# Allegro board Rk3399_fanout.brd
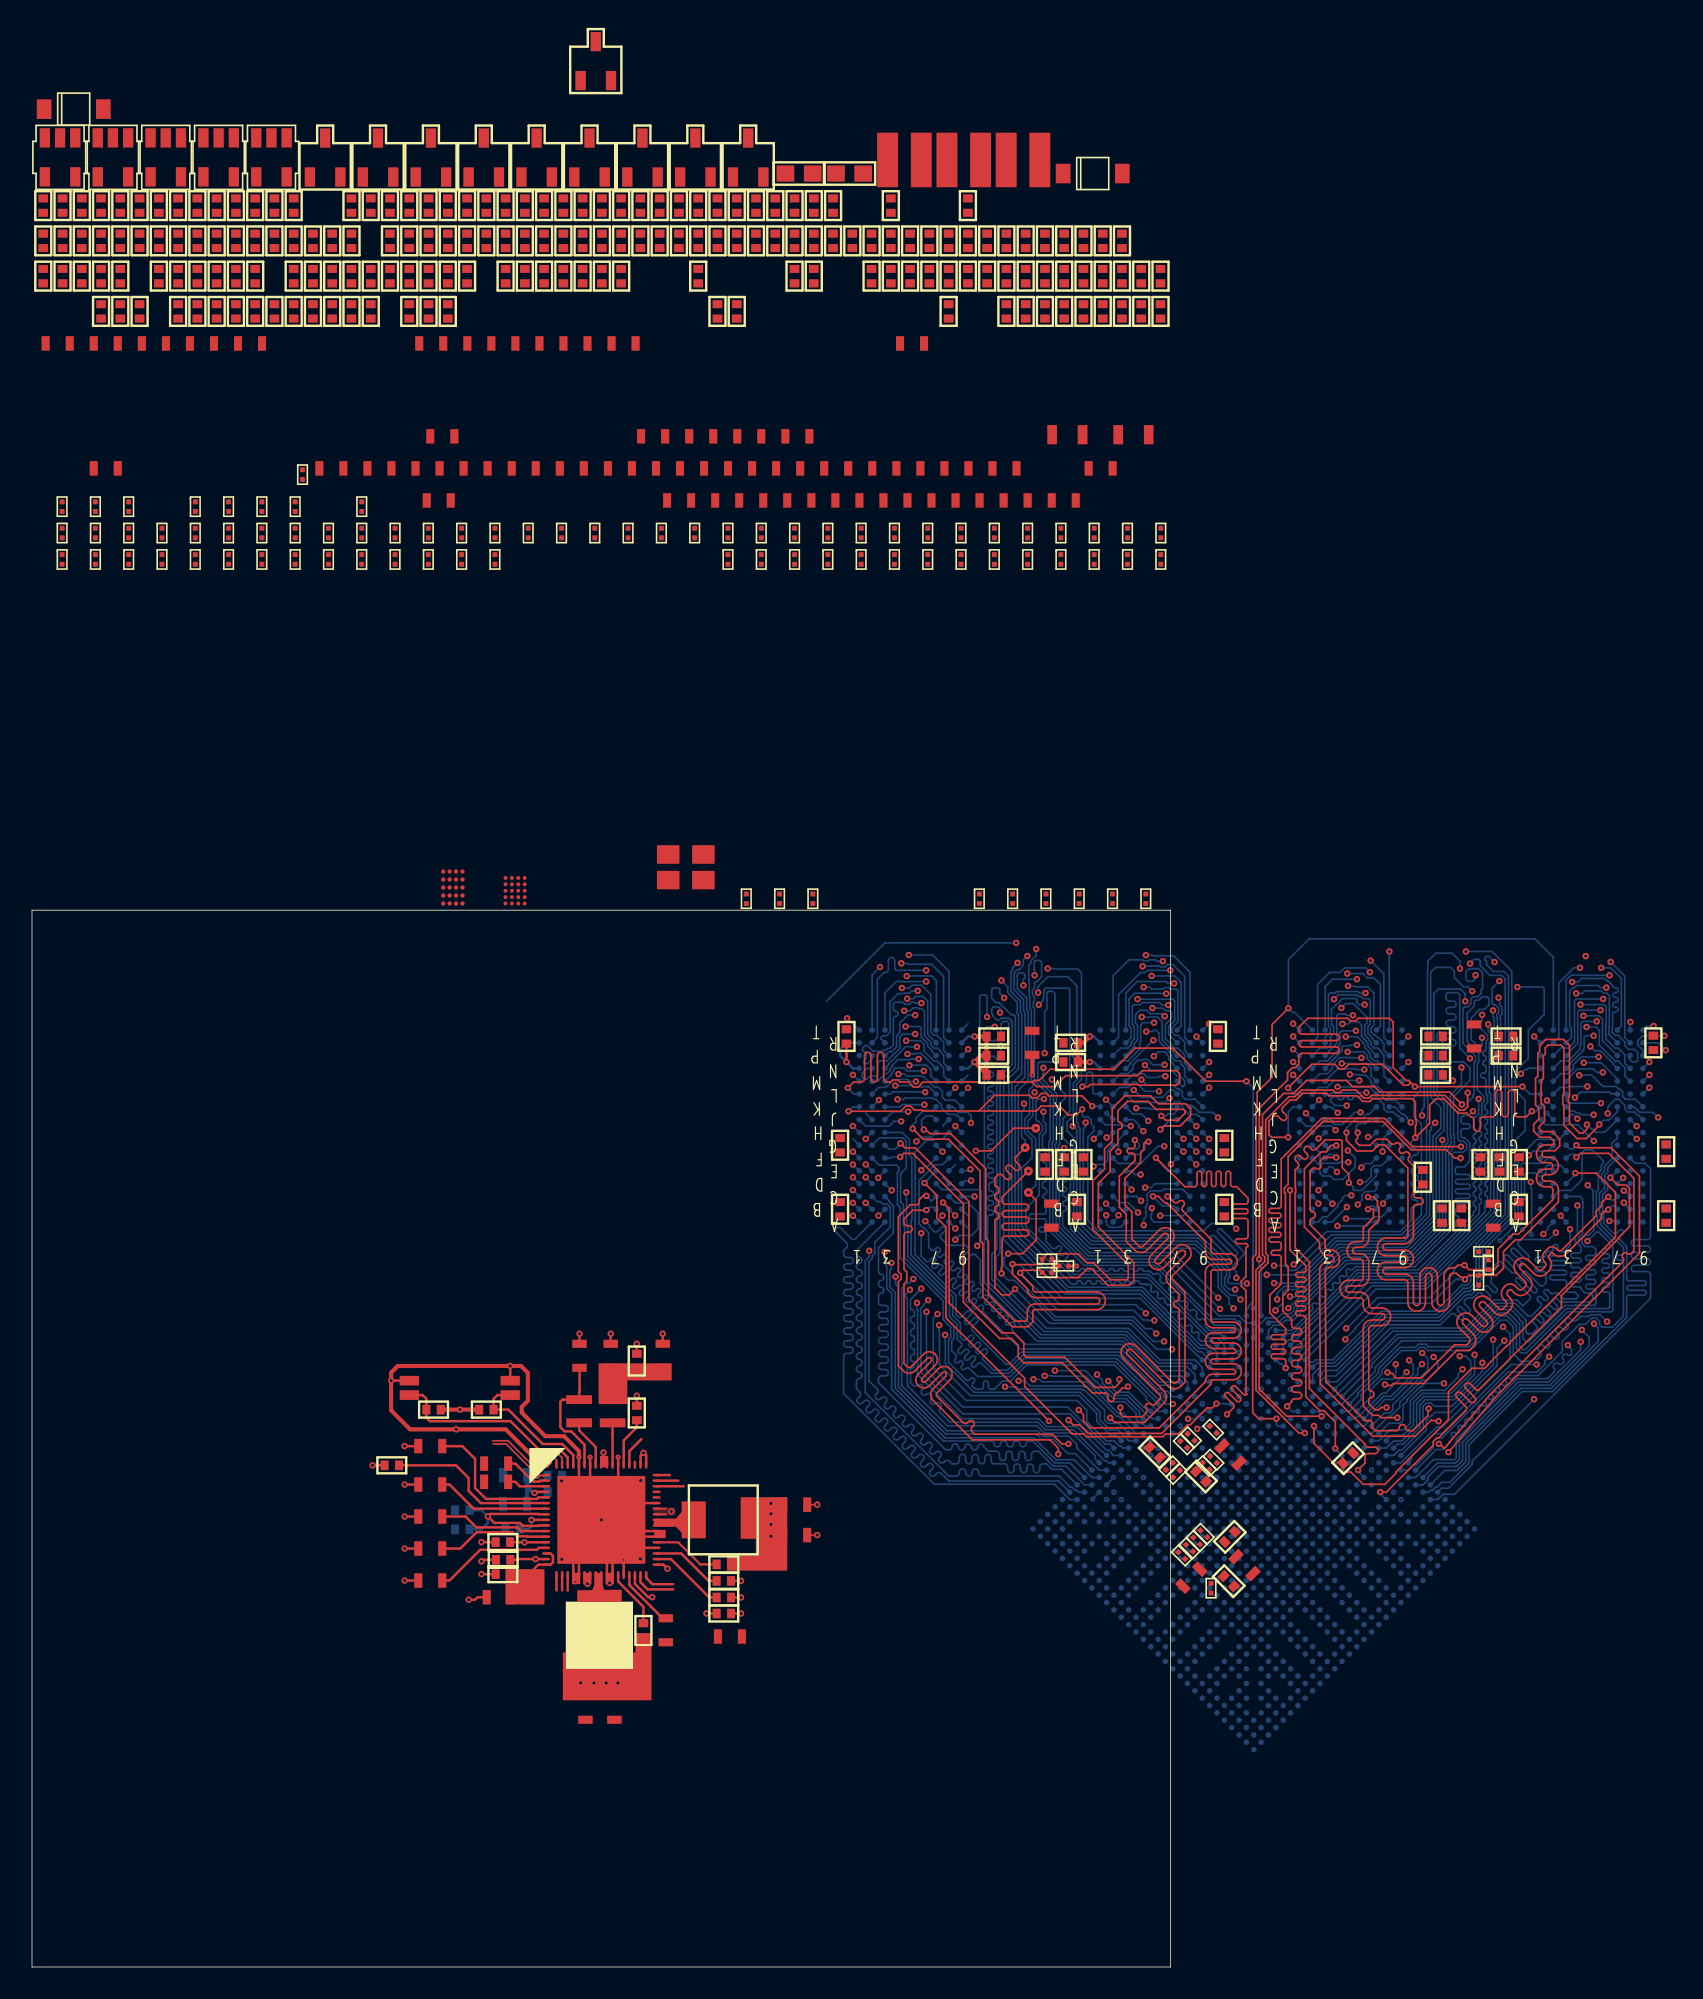
[diagram p0: board, top side]
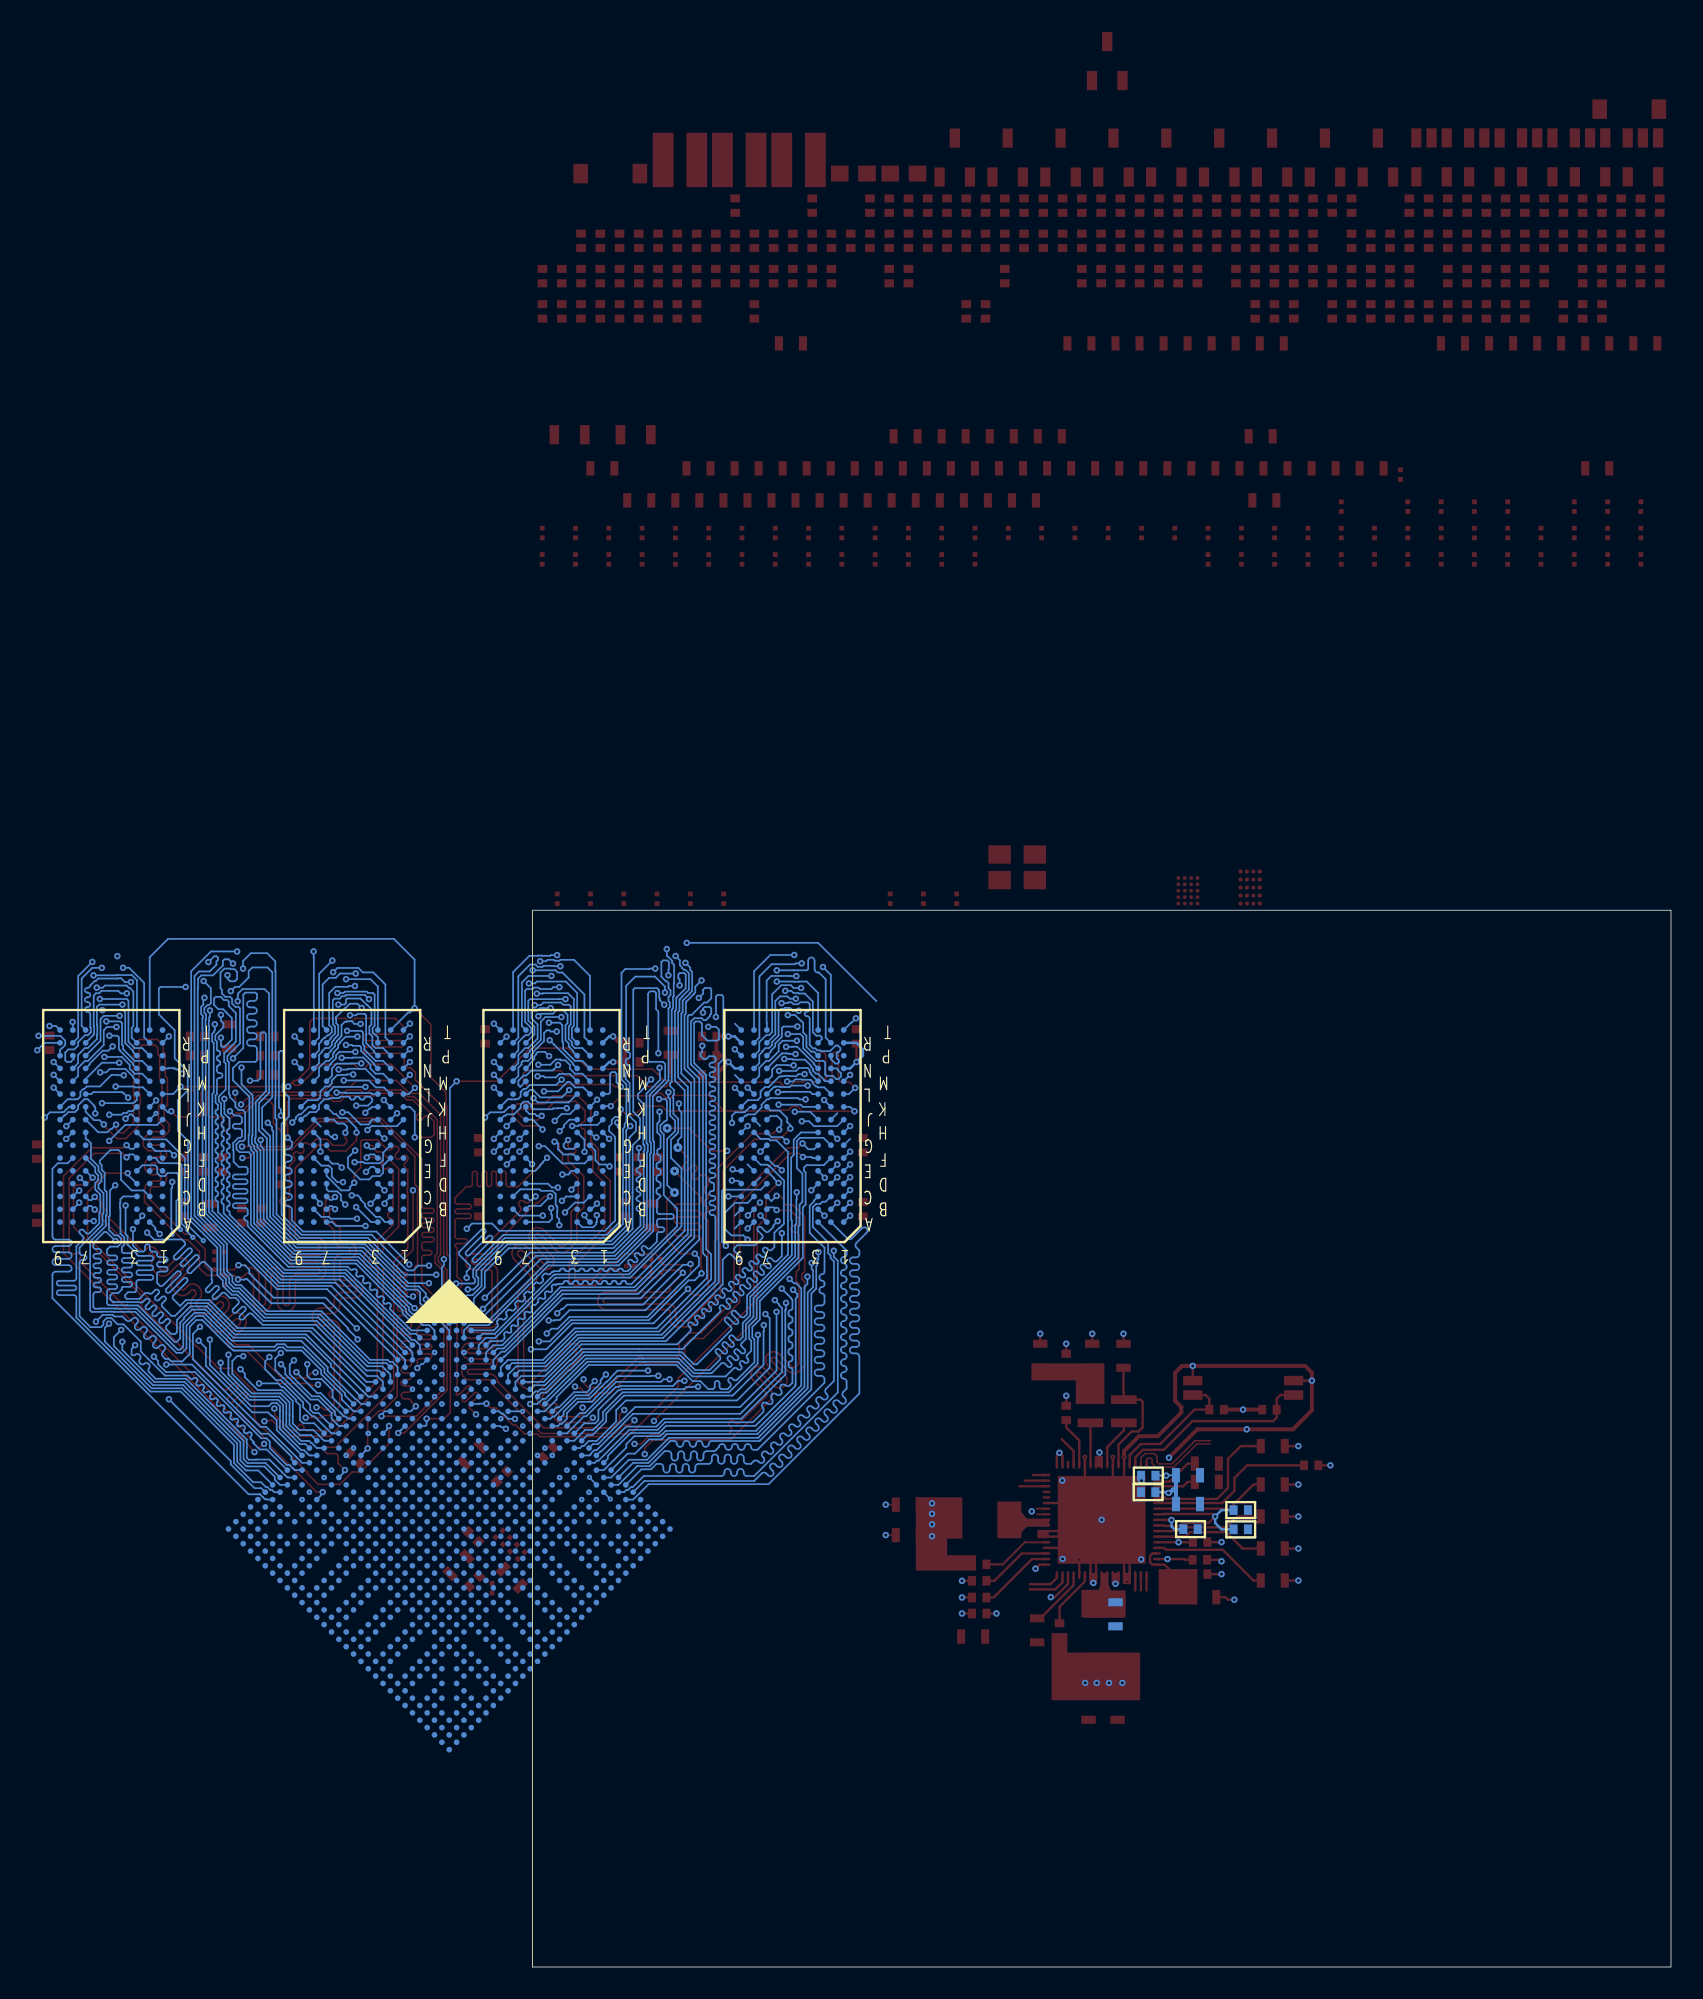
[diagram p1: board, bottom side, seen from below]

Outline 71.12 x 66.04 mm; copper layers: TOP, GND1, PWR, INT3, GND2, BOTTOM. Coordinates in mm from the lower left corner of the outline.
Outline path: 0,66.04 0,0 71.12,0 71.12,66.04 0,66.04

## Design rules (mm)
net group DDR0_PLL_TESTOUT: nets DDR0_PLL_TESTOUT_N DDR0_PLL_TESTOUT_P
net group DDR1_PLL_TESTOUT: nets DDR1_PLL_TESTOUT_N DDR1_PLL_TESTOUT_P
net group EDP_AUX: nets EDP_AUXN EDP_AUXP
net group EDP_TX0: nets EDP_TX0N EDP_TX0P
net group EDP_TX1: nets EDP_TX1N EDP_TX1P
net group EDP_TX2: nets EDP_TX2N EDP_TX2P
net group EDP_TX3: nets EDP_TX3N EDP_TX3P
net group HDMI_TX0: nets HDMI_TX0N HDMI_TX0P
net group HDMI_TX1: nets HDMI_TX1N HDMI_TX1P
net group HDMI_TX2: nets HDMI_TX2N HDMI_TX2P
net group HDMI_TXC: nets HDMI_TXCN HDMI_TXCP
net group HOST0_D: nets HOST0_DN HOST0_DP
net group HOST1_D: nets HOST1_DN HOST1_DP
net group MIPI_RX0_CLK: nets MIPI_RX0_CLKN MIPI_RX0_CLKP
net group MIPI_RX0_D0: nets MIPI_RX0_D0N MIPI_RX0_D0P
net group MIPI_TX0_CLK: nets MIPI_TX0_CLKN MIPI_TX0_CLKP
net group PCIE_REF_CLK: nets PCIE_REF_CLKN PCIE_REF_CLKP
net group PCIE_RX0: nets PCIE_RX0_N PCIE_RX0_P
net group PCIE_RX1: nets PCIE_RX1_N PCIE_RX1_P
net group PCIE_RX2: nets PCIE_RX2_N PCIE_RX2_P
net group PCIE_RX3: nets PCIE_RX3_N PCIE_RX3_P
net group PCIE_TX0: nets PCIE_TX0N PCIE_TX0P
net group PCIE_TX1: nets PCIE_TX1N PCIE_TX1P
net group PCIE_TX2: nets PCIE_TX2N PCIE_TX2P
net group PCIE_TX3: nets PCIE_TX3N PCIE_TX3P
net group TYPCE1_TX2: nets TYPEC1_TX2M TYPEC1_TX2P
net group TYPE0_D: nets TYPE0_DN TYPE0_DP
net group TYPEC0_RCLK: nets TYPEC0_RCLKM TYPEC0_RCLKP
net group TYPEC0_RX1: nets TYPEC0_RX1N TYPEC0_RX1P
net group TYPEC0_RX2: nets TYPEC0_RX2N TYPEC0_RX2P
net group TYPEC1_RCLK: nets TYPEC1_RCLKM TYPEC1_RCLKP
net group TYPEC1_RX2: nets TYPEC1_RX2M TYPEC1_RX2P
net group USB3_D: nets USB3_DN USB3_DP
net group USB3_SSRX: nets USB3_SSRXN USB3_SSRXP
net group USB3_SSTX: nets USB3_SSTXN USB3_SSTXP
net group DDR0_CLK: nets DDR0_CLKN
net group DDR0_DQS0: nets DDR0_DQS0N
net group DDR0_DQS1: nets DDR0_DQS1N
net group DDR0_DQS2: nets DDR0_DQS2N
net group DDR0_DQS3: nets DDR0_DQS3N
net group DDR1_CLK: nets DDR1_CLKN
net group DDR1_DQS0: nets DDR1_DQS0N
net group DDR1_DQS1: nets DDR1_DQS1N
net group DDR1_DQS2: nets DDR1_DQS2N
net group DDR1_DQS3: nets DDR1_DQS3N
nets with their own width: min track width 0.1; nets DDR0_CLK

## Placement (name value [footprint] x y rotation side)
C1  10uF  [0603C]  30.17 30.73 0 bottom
C2  22uF  [0603C]  47.67 26.99 0 top
C3  22uF  [0603C]  47.67 28.89 0 top
C4  22uF  [0603C]  34.7 22.04 90 bottom
C5  22uF  [0603C]  34.57 16.2 270 top
C6  22uF  [0603C]  36.38 16.2 270 top
C7  1uF  [0402C]  43.21 23.09 90 top
C8  1uF  [0402C]  43.21 22.09 90 top
C9  1uF  [0402C]  32.66 29.68 270 bottom
C10  1uF  [0402C]  29.41 26.55 270 top
C11  1uF  [0402C]  32.65 30.71 270 bottom
C12  1uF  [0402C]  29.43 25.45 270 top
C13  1uF  [0402C]  26.87 28.55 90 bottom
C14  1uF  [0402C]  26.87 27.35 90 bottom
C15  1uF  [0402C]  29.41 24.55 270 top
C16  22uF  [0603C]  34.2 38.2 90 top
C17  22uF  [0603C]  30.17 28.93 180 bottom
C18  10uF  [0603C]  36.15 38.2 90 top
C19  22uF  [0603C]  39.4 38.2 90 top
C20  2.2uF  [0603C]  39.59 21.04 270 top
C21  2.2uF  [0603C]  43.59 20.65 0 top
C22  2.2uF  [0603C]  28.99 30.32 180 top
C23  2.2uF  [0603C]  24.87 32.55 180 top
C24  2.2uF  [0603C]  24.87 26.15 180 top
C25  2.2uF  [0603C]  24.87 24.15 180 top
C26  2.2uF  [0603C]  28.99 31.46 180 top
C27  2.2uF  [0603C]  29.15 23.11 180 top
C28  2.2uF  [0603C]  24.87 30.15 180 top
C29  2.2uF  [0603C]  24.87 28.15 180 top
C30  1uF  [0402C]  30.01 27.36 270 bottom
C31  100nF  [0402C]  43.21 24.13 270 top
C32  1uF  [0402C]  41.61 105.66 0 top
C33  100nF  [0402C]  22.47 31.35 270 top
C36  22nF  [0402C]  35.6 105.66 0 top
C37  47pF  [0402C]  37.77 37.87 180 top
C38  12pF  [0402C]  25.08 34.83 270 top
C39  12pF  [0402C]  28.38 34.83 90 top
C40  10uF  [0402C]  74.75 24.11 225 top
C41  10uF  [0402C]  9.13 103.46 0 top
C42  10uF  [0402C]  10.33 103.46 0 top
C43  10uF  [0402C]  11.53 103.46 0 top
C44  10uF  [0402C]  12.74 103.46 0 top
C45  22uF  [0603C]  4.61 93.65 0 top
C46  10uF  [0402C]  13.94 103.46 0 top
C47  1uF  [0402C]  19.95 103.46 0 top
C53  22uF  [0603C]  75.73 25.11 315 top
C54  22uF  [0603C]  72.41 24.33 225 top
C61  22uF  [0603C]  7.61 101.46 0 top
C62  22uF  [0603C]  18.7 93.65 0 top
C63  22uF  [0603C]  21.7 93.65 0 top
C64  1uF  [0402C]  21.16 103.46 0 top
C65  1uF  [0402C]  74.81 26.88 315 top
C72  22uF  [0603C]  24.71 93.65 0 top
C73  22uF  [0603C]  27.71 93.65 0 top
C74  22uF  [0603C]  30.71 93.65 0 top
C75  22uF  [0603C]  33.71 93.65 0 top
C76  1uF  [0402C]  23.56 103.46 0 top
C82  22uF  [0603C]  36.72 93.65 0 top
C83  22uF  [0603C]  39.72 93.65 0 top
C84  22uF  [0603C]  42.72 93.65 0 top
C87  22uF  [0603C]  45.73 93.65 0 top
C88  22uF  [0603C]  48.73 93.65 0 top
C89  22uF  [0603C]  51.73 93.65 0 top
C90  22uF  [0603C]  54.74 93.65 0 top
C91  100nF  [0402C]  7.92 105.66 0 top
C92  100nF  [0402C]  9.13 105.66 0 top
C93  22uF  [0603C]  57.74 93.65 0 top
C94  10uF  [0603C]  1.6 101.46 0 top
C95  1uF  [0402C]  24.77 103.46 0 top
C101  100nF  [0201C]  44.61 66.75 0 top
C102  100nF  [0201C]  46.69 66.75 0 top
C103  100nF  [0201C]  48.77 66.75 0 top
C104  100nF  [0201C]  65.41 66.75 0 top
C105  100nF  [0201C]  72.3 26.18 225 top
C106  100nF  [0201C]  72.74 26.62 225 top
C107  100nF  [0201C]  73.19 27.07 225 top
C108  100nF  [0201C]  73.64 23.67 0 top
C109  100nF  [0201C]  59.17 66.75 0 top
C110  100nF  [0201C]  61.25 66.75 0 top
C111  100nF  [0201C]  63.33 66.75 0 top
C112  100nF  [0201C]  12.28 87.96 0 top
C113  100nF  [0201C]  67.49 66.75 0 top
C114  100nF  [0201C]  69.57 66.75 0 top
C115  100nF  [0201C]  1.88 87.96 0 top
C116  100nF  [0201C]  3.96 87.96 0 top
C117  100nF  [0201C]  6.04 87.96 0 top
C118  100nF  [0201C]  8.12 87.96 0 top
C119  100nF  [0201C]  10.2 87.96 0 top
C120  1nF  [0201C]  6.04 91.26 0 top
C121  1nF  [0201C]  71.81 25.71 225 top
C122  1nF  [0201C]  16.9 93.26 0 top
C123  1nF  [0201C]  12.28 91.26 0 top
C124  1nF  [0201C]  14.36 91.26 0 top
C125  100nF  [0201C]  47.63 87.96 0 top
C126  100nF  [0201C]  14.36 87.96 0 top
C127  100nF  [0201C]  16.44 87.96 0 top
C128  100nF  [0201C]  18.52 87.96 0 top
C129  100nF  [0201C]  20.6 87.96 0 top
C130  12pF  [0402C]  36.8 105.66 0 top
C131  12pF  [0402C]  57.25 103.46 0 top
C132  100nF  [0201C]  22.68 87.96 0 top
C133  1uF  [0201C]  16.44 91.26 0 top
C134  100nF  [0201C]  24.76 87.96 0 top
C135  100nF  [0201C]  26.83 87.96 0 top
C136  100nF  [0201C]  28.91 87.96 0 top
C137  22uF  [0603C]  74.86 32.02 315 top
C138  10uF  [0402C]  73.02 30.66 225 top
C139  1uF  [0201C]  73.8 31.71 225 top
C140  100nF  [0201C]  73.33 31.3 45 top
C141  100nF  [0201C]  73.78 33.59 225 top
C142  100nF  [0201C]  72.4 33.11 225 top
C143  100nF  [0201C]  71.04 31.29 315 top
C144  100nF  [0201C]  71.94 32.66 225 top
C145  100nF  [0201C]  71.49 30.82 315 top
C146  1uF  [0402C]  15.14 103.46 0 top
C147  1uF  [0402C]  16.34 103.46 0 top
C148  1uF  [0402C]  17.55 103.46 0 top
C149  1uF  [0402C]  18.75 103.46 0 top
C150  100nF  [0201C]  43.47 87.96 0 top
C151  100nF  [0201C]  45.55 87.96 0 top
C152  100nF  [0201C]  10.2 89.61 0 top
C153  100nF  [0201C]  49.71 87.96 0 top
C154  22uF  [0603C]  25.4 91.65 0 top
C155  10uF  [0402C]  4.31 103.46 0 top
C156  1uF  [0201C]  20.6 91.26 0 top
C157  100nF  [0201C]  51.79 87.96 0 top
C158  100nF  [0201C]  53.87 87.96 0 top
C159  100nF  [0201C]  55.95 87.96 0 top
C160  100nF  [0201C]  58.03 87.96 0 top
C161  100nF  [0201C]  60.11 87.96 0 top
C162  100nF  [0201C]  62.19 87.96 0 top
C163  100nF  [0201C]  64.27 87.96 0 top
C164  100nF  [0201C]  66.35 87.96 0 top
C165  100nF  [0201C]  68.43 87.96 0 top
C166  100nF  [0201C]  70.51 87.96 0 top
C167  100nF  [0201C]  1.88 89.61 0 top
C168  100nF  [0201C]  3.96 89.61 0 top
C169  100nF  [0201C]  6.04 89.61 0 top
C170  100nF  [0201C]  8.12 89.61 0 top
C171  100nF  [0201C]  10.2 91.26 0 top
C172  100nF  [0201C]  12.28 89.61 0 top
C173  100nF  [0201C]  14.36 89.61 0 top
C174  100nF  [0201C]  16.44 89.61 0 top
C175  100nF  [0201C]  18.52 89.61 0 top
C176  100nF  [0201C]  20.6 89.61 0 top
C177  100nF  [0402C]  25.97 103.46 0 top
C178  10uF  [0603C]  54.97 101.46 0 top
C179  1uF  [0402C]  50.03 110.07 0 top
C180  1uF  [0402C]  47.63 105.66 0 top
C181  100nF  [0201C]  22.68 89.61 0 top
C182  100nF  [0201C]  24.76 89.61 0 top
C183  8pF  [0402C]  10.33 105.66 0 top
C184  8pF  [0402C]  11.53 105.66 0 top
C185  100nF  [0201C]  26.83 89.61 0 top
C186  100nF  [0201C]  28.91 89.61 0 top
C187  100nF  [0201C]  30.99 89.61 0 top
C188  47pF  [0402C]  12.74 105.66 0 top
C189  100nF  [0201C]  33.07 89.61 0 top
C190  47pF  [0402C]  13.94 105.66 0 top
C191  100nF  [0201C]  35.15 89.61 0 top
C192  100nF  [0201C]  37.23 89.61 0 top
C193  100nF  [0201C]  39.31 89.61 0 top
C194  100nF  [0201C]  41.39 89.61 0 top
C195  100nF  [0201C]  43.47 89.61 0 top
C196  100nF  [0201C]  45.55 89.61 0 top
C197  100nF  [0201C]  47.63 89.61 0 top
C198  100nF  [0201C]  49.71 89.61 0 top
C199  100nF  [0201C]  51.79 89.61 0 top
C200  100nF  [0201C]  53.87 89.61 0 top
C201  100nF  [0201C]  55.95 89.61 0 top
C202  NC  [0402C]  16.34 105.66 0 top
C203  100nF  [0201C]  58.03 89.61 0 top
C204  100nF  [0201C]  60.11 89.61 0 top
C205  100nF  [0201C]  62.19 89.61 0 top
C206  100nF  [0201C]  64.27 89.61 0 top
C207  100nF  [0201C]  66.35 89.61 0 top
C208  100nF  [0201C]  68.43 89.61 0 top
C209  100nF  [0201C]  70.51 89.61 0 top
C210  100nF  [0201C]  1.88 91.26 0 top
C211  100nF  [0201C]  3.96 91.26 0 top
C212  NC  [0201C]  64.45 43.81 90 top
C213  10uF  [0603C]  62.47 57.75 90 top
C214  1uF  [0402C]  60.07 55.75 270 top
C215  100nF  [0402C]  64.87 57.75 90 top
C216  100nF  [0402C]  60.07 58.15 270 top
C217  100nF  [0402C]  60.07 56.95 270 top
C218  100nF  [0402C]  64.87 56.55 90 top
C219  100nF  [0402C]  50.87 58.15 0 top
C220  10uF  [0603C]  63.67 46.95 270 top
C221  1uF  [0402C]  64.47 50.15 0 top
C222  100nF  [0402C]  63.27 50.15 0 top
C223  100nF  [0402C]  74.07 58.15 0 top
C224  100nF  [0402C]  65.67 50.15 0 top
C225  100nF  [0402C]  50.47 47.35 180 top
C226  100nF  [0402C]  65.27 47.35 180 top
C227  100nF  [0402C]  50.47 51.35 0 top
C228  100nF  [0402C]  74.47 51.35 0 top
C229  100nF  [0402C]  74.47 47.35 180 top
C230  100nF  [0402C]  42.82 103.46 0 top
C231  100nF  [0402C]  44.02 103.46 0 top
C232  1nF  [0402C]  18.75 105.66 0 top
C233  1nF  [0402C]  19.95 105.66 0 top
C234  1nF  [0402C]  21.16 105.66 0 top
C235  10uF  [0603C]  90.07 58.15 90 top
C236  1uF  [0402C]  87.67 58.15 270 top
C237  100nF  [0402C]  87.67 56.95 270 top
C238  100nF  [0402C]  87.67 55.75 270 top
C239  100nF  [0402C]  92.07 58.15 90 top
C240  100nF  [0402C]  92.07 56.95 90 top
C241  100nF  [0402C]  101.27 57.75 0 top
C242  10uF  [0603C]  91.27 46.95 270 top
C243  1uF  [0402C]  90.47 50.15 0 top
C244  100nF  [0402C]  91.67 50.15 0 top
C245  100nF  [0402C]  92.87 50.15 0 top
C246  100nF  [0402C]  92.87 47.35 180 top
C247  100nF  [0402C]  102.07 50.95 0 top
C248  100nF  [0402C]  102.07 46.95 180 top
C249  100nF  [0402C]  86.87 49.35 0 top
C250  100nF  [0402C]  88.07 46.95 180 top
C251  100nF  [0402C]  89.27 46.95 180 top
C252  100nF  [0402C]  60.86 103.46 0 top
C253  100nF  [0402C]  62.07 103.46 0 top
C254  1nF  [0402C]  22.36 105.66 0 top
C255  1nF  [0402C]  23.56 105.66 0 top
C256  1nF  [0402C]  24.77 105.66 0 top
C257  NC  [0201C]  90.66 44.7 270 top
C258  10uF  [0603C]  36.95 101.46 0 top
C259  100nF  [0402C]  25.97 105.66 0 top
C260  22uF  [0603C]  40.42 91.65 0 top
C261  100nF  [0402C]  63.27 103.46 0 top
C262  100pF  [0402C]  29.58 105.66 0 top
C263  10uF  [0603C]  33.95 101.46 0 top
C264  100nF  [0402C]  27.17 105.66 0 top
C265  100pF  [0402C]  30.78 105.66 0 top
C266  10uF  [0603C]  30.94 101.46 0 top
C267  100nF  [0402C]  64.47 103.46 0 top
C268  10uF  [0603C]  27.94 101.46 0 top
C269  100nF  [0402C]  65.68 103.46 0 top
C270  10nF  [0402C]  33.19 105.66 0 top
C271  NC  [0402C]  17.55 105.66 0 top
C272  2.2uF  [0603C]  25.63 95.65 0 top
C273  4.7uF  [0603C]  38.8 95.65 0 top
C274  4.7uF  [0603C]  41.8 95.65 0 top
C275  100nF  [0402C]  66.88 103.46 0 top
C276  10nF  [0402C]  34.39 105.66 0 top
C277  100nF  [0402C]  68.08 103.46 0 top
C278  10uF  [0402C]  5.52 103.46 0 top
C279  100nF  [0402C]  69.29 103.46 0 top
C280  10uF  [0603C]  24.94 101.46 0 top
C281  10uF  [0603C]  60.74 93.65 0 top
C282  22uF  [0603C]  43.42 91.65 0 top
C283  22uF  [0603C]  46.42 91.65 0 top
C284  22uF  [0603C]  49.43 91.65 0 top
C285  22uF  [0603C]  52.43 91.65 0 top
C286  10uF  [0603C]  13.62 101.46 0 top
C287  100nF  [0402C]  70.49 103.46 0 top
C288  100pF  [0402C]  31.99 105.66 0 top
C289  10uF  [0603C]  66.75 93.65 0 top
C290  100nF  [0402C]  0.7 105.66 0 top
C291  100nF  [0402C]  1.91 105.66 0 top
C292  10uF  [0603C]  10.61 101.46 0 top
C293  10uF  [0603C]  4.61 101.46 0 top
C294  22uF  [0603C]  55.43 91.65 0 top
C295  22uF  [0603C]  58.44 91.65 0 top
C296  22uF  [0603C]  61.44 91.65 0 top
C297  22uF  [0603C]  64.44 91.65 0 top
C298  4.7uF  [0603C]  44.8 95.65 0 top
C299  4.7uF  [0603C]  47.81 95.65 0 top
C300  100nF  [0402C]  3.11 105.66 0 top
C302  100nF  [0402C]  4.31 105.66 0 top
C303  10uF  [0402C]  6.72 103.46 0 top
C304  100nF  [0402C]  5.52 105.66 0 top
D1  BZT52C3V3  [SOD-123]  2.6 116.1 0 top
D2  1N5819  [SOD-123]  66.25 112.07 0 top
L1  1uH  [WURTH_4012]  43.18 27.94 180 top
L2  1uH  [WURTH_4020]  35.44 20.73 270 top
L3  1uH  [0806L]  34.17 34.73 270 top
L4  1uH  [0806L]  36.27 34.73 270 top
L5  3.3uH  [WURTH_3015]  61.9 112.92 0 top
L6  3.3uH  [WURTH_3015]  58.2 112.92 0 top
L7  240nH  [252012]  64.67 95.75 0 top
L8  3.3uH  [WURTH_3015]  54.49 112.92 0 top
L9  240nH  [252012]  68.8 95.75 0 top
Q1  TSM2314CX  [SOT23]  41.43 113.07 0 top
Q2  TSM2314CX  [SOT23]  21.61 113.07 0 top
Q3  TSM2314CX  [SOT23]  28.22 113.07 0 top
Q4  TSM2314CX  [SOT23]  24.92 113.07 0 top
Q5  BC817  [SOT-23]  35.22 119.1 0 top
Q6  TSM2314CX  [SOT23]  38.13 113.07 0 top
Q7  TSM2314CX  [SOT23]  34.83 113.07 0 top
Q8  TSM2314CX  [SOT23]  31.52 113.07 0 top
Q9  TSM2314CX  [SOT23]  44.73 113.07 0 top
Q10  TSM2314CX  [SOT23]  18.31 113.07 0 top
R1  10K  [0402R]  48.83 105.66 0 top
R2  10K  [0402R]  57.25 105.66 0 top
R3  100K  [0402R]  37.77 34.62 0 top
R4  100R  [0402R]  38.19 21.03 0 top
R5  100R  [0402R]  43.21 25.16 90 top
R6  10K  [0402R]  1.91 107.87 0 top
R8  NC  [0402R]  63.27 107.87 0 top
R9  NC  [0402R]  64.47 107.87 0 top
R10  10K  [0402R]  53.64 105.66 0 top
R11  NC/10k  [0402R]  52.44 107.87 0 top
R12  10K  [0402R]  53.64 110.07 0 top
R13  10K  [0402R]  56.05 105.66 0 top
R14  240  [0402R]  70.13 32.16 225 top
R15  240  [0402R]  82.21 31.8 135 top
R16  0R  [0402R]  36.8 107.87 0 top
R17  0R  [0402R]  38 107.87 0 top
R18  0R  [0402R]  39.21 107.87 0 top
R19  0R  [0402R]  40.41 107.87 0 top
R20  10K  [0402R]  58.46 105.66 0 top
R21  10K  [0402R]  59.66 105.66 0 top
R22  10K  [0402R]  60.86 105.66 0 top
R23  10K  [0402R]  62.07 105.66 0 top
R24  10K  [0402R]  63.27 105.66 0 top
R25  10K  [0402R]  64.47 105.66 0 top
R26  10K  [0402R]  65.68 105.66 0 top
R27  10K  [0402R]  66.88 105.66 0 top
R28  10K  [0402R]  68.08 105.66 0 top
R29  10K  [0402R]  69.29 105.66 0 top
R30  47k  [0402R]  57.25 107.87 0 top
R31  133  [0402R]  10.33 110.07 0 top
R32  133  [0402R]  11.53 110.07 0 top
R33  499  [0402R]  12.74 110.07 0 top
R34  499  [0402R]  13.94 110.07 0 top
R35  499  [0402R]  15.14 110.07 0 top
R36  499  [0402R]  16.34 110.07 0 top
R37  10K  [0402R]  70.49 105.66 0 top
R38  10K  [0402R]  0.7 107.87 0 top
R39  100K  [0402R]  22.36 107.87 0 top
R40  100K  [0402R]  23.56 107.87 0 top
R41  100K  [0402R]  24.77 107.87 0 top
R42  100K  [0402R]  25.97 107.87 0 top
R43  0R  [0402R]  41.61 107.87 0 top
R44  0R  [0603R]  51.07 112.07 0 top
R45  0R  [0603R]  47.91 112.07 0 top
R46  22R  [0402R]  19.95 110.07 0 top
R47  22R  [0402R]  21.16 110.07 0 top
R48  4.02K  [0402R]  30.78 110.07 0 top
R49  4.02K  [0402R]  31.99 110.07 0 top
R50  1k  [0402R]  34.39 107.87 0 top
R51  1.62K  [0402R]  34.39 110.07 0 top
R52  4.02K  [0402R]  33.19 110.07 0 top
R53  6.04K  [0402R]  35.6 110.07 0 top
R54  22R  [0402R]  22.36 110.07 0 top
R55  22R  [0402R]  23.56 110.07 0 top
R56  22R  [0402R]  24.77 110.07 0 top
R57  22R  [0402R]  25.97 110.07 0 top
R58  22R  [0402R]  27.17 110.07 0 top
R59  22R  [0402R]  28.38 110.07 0 top
R60  22R  [0402R]  29.58 110.07 0 top
R61  4K7  [0402R]  36.8 110.07 0 top
R62  4K7  [0402R]  38 110.07 0 top
R63  4K7  [0402R]  39.21 110.07 0 top
R64  4K7  [0402R]  40.41 110.07 0 top
R65  1K5  [0402R]  41.61 110.07 0 top
R66  2K2  [0402R]  42.82 110.07 0 top
R67  2K2  [0402R]  44.02 110.07 0 top
R68  0R  [0402R]  42.82 107.87 0 top
R69  0R  [0402R]  44.02 107.87 0 top
R70  0R  [0402R]  45.22 107.87 0 top
R71  0R  [0402R]  46.42 107.87 0 top
R72  2K2  [0402R]  45.22 110.07 0 top
R73  2K2  [0402R]  46.42 110.07 0 top
R74  2K2  [0402R]  47.63 110.07 0 top
R75  2K2  [0402R]  48.83 110.07 0 top
R76  0R  [0402R]  47.63 107.87 0 top
R77  0R  [0402R]  48.83 107.87 0 top
R78  0R  [0402R]  50.03 107.87 0 top
R79  0R  [0402R]  51.24 107.87 0 top
R80  240  [0402R]  0.7 110.07 0 top
R81  240  [0402R]  1.91 110.07 0 top
R82  240  [0402R]  3.11 110.07 0 top
R83  240  [0402R]  4.31 110.07 0 top
R84  240  [0402R]  5.52 110.07 0 top
R85  240  [0402R]  6.72 110.07 0 top
R86  240  [0402R]  7.92 110.07 0 top
R87  240  [0402R]  9.13 110.07 0 top
R88  51R  [0201R]  63.4 44.24 90 top
R89  51R  [0201R]  63.4 43.41 90 top
R90  10K  [0402R]  3.11 107.87 0 top
R91  10K  [0402R]  4.31 107.87 0 top
R92  10K  [0402R]  5.52 107.87 0 top
R93  10K  [0402R]  6.72 107.87 0 top
R94  51R  [0201R]  90.97 43.88 180 top
R95  51R  [0201R]  90.36 42.92 0 top
R96  10K  [0402R]  7.92 107.87 0 top
R97  100  [0402R]  60.86 107.87 0 top
R98  100K  [0402R]  27.17 107.87 0 top
R99  200K  [0402R]  29.58 107.87 0 top
R100  12K  [0402R]  9.13 107.87 0 top
R101  3.9K  [0402R]  10.33 107.87 0 top
R102  118K  [0402R]  11.53 107.87 0 top
R103  39K  [0402R]  13.94 107.87 0 top
R104  100K  [0402R]  15.14 107.87 0 top
R105  200K  [0402R]  28.38 107.87 0 top
R106  1k  [0402R]  30.78 107.87 0 top
R107  100K  [0402R]  16.34 107.87 0 top
R108  0R  [0402R]  35.6 107.87 0 top
R109  100K  [0402R]  17.55 107.87 0 top
R110  47k  [0402R]  53.64 107.87 0 top
R111  10K  [0402R]  58.46 110.07 0 top
R112  118K  [0402R]  12.74 107.87 0 top
R113  47k  [0402R]  54.85 107.87 0 top
R114  1k  [0402R]  31.99 107.87 0 top
R115  100K  [0402R]  18.75 107.87 0 top
R116  100  [0402R]  58.46 107.87 0 top
R117  10K  [0402R]  52.44 105.66 0 top
R118  NC  [0402R]  62.07 107.87 0 top
R119  330K  [0402R]  65.68 107.87 0 top
R120  33K  [0402R]  66.88 107.87 0 top
R121  150K  [0402R]  68.08 107.87 0 top
R122  10K  [0402R]  54.85 105.66 0 top
R123  100  [0402R]  59.66 107.87 0 top
R124  47k  [0402R]  56.05 107.87 0 top
R125  1k  [0402R]  33.19 107.87 0 top
R126  100K  [0402R]  19.95 107.87 0 top
U1  Rockchip RK808  [QFN68_7X7]  35.56 27.94 0 top
U2  Rockchip RK3399  [FCBGA828]  76.31 27.37 225 bottom
U3  K4B4G1646E-BCMA  [FBGA96]  69.92 52.55 0 bottom
U4  K4B4G1646E-BCMA  [FBGA96]  54.87 52.55 0 bottom
U5  K4B4G1646E-BCMA  [FBGA96]  82.37 52.55 0 bottom
U6  K4B4G1646E-BCMA  [FBGA96]  97.42 52.55 0 bottom
U7  SY8088AAC/PT3409A/B  [SOT23-5]  14.96 113.08 0 top
U8  SY8088AAC/PT3409A/B  [SOT23-5]  8.35 113.08 0 top
U9  PT5108E23E-18  [SOT23-5]  1.75 113.08 0 top
U10  SYR828PKC  [CSP156X196-20]  30.17 67.25 0 top
U11  SY8088AAC/PT3409A/B  [SOT23-5]  11.66 113.08 0 top
U12  SYR837PKC  [WLCSP-20-P1]  26.29 67.45 0 top
U13  NCP585HSN09T1G  [SOT23-5]  5.05 113.08 0 top
Y1  32.768kHz  [MC-146]  26.72 36.19 0 top
Y2  24MHz TSX-3225 9pF  [TSX-3225]  40.84 68.72 0 top

## Library data of the parts
C1 C18 C94 C178 C213 C220 C235 C242 C258 C263 C266 C268 C280 C281 C286 C289 C292 C293 = 10uF 0603 10V 10%
C2-C6 C16 C17 C19 C45 C53 C54 C61-C63 C72-C75 C82-C84 C87-C90 C93 C137 C154 C260 C282-C285 C294-C297 = 22uF 0603 10V 20%
C7-C15 C30 C32 C179 C180 C214 C221 C236 C243 = 1uF 0402 16V 10%
C20-C29 C272 = 2.2uF 0603 10V 10%
C31 C259 C264 = 100nF 0402 16V 10%
C33 C91 C92 C177 C215-C219 C222-C231 C237-C241 C244-C253 C261 C267 C269 C275 C277 C279 C287 C290 C291 C300 C302 C304 = 100nF 0402 10v 10%
C36 = 22nF 0402 10V 10%
C37 C188 C190 = 47pF 0402 50V 5%
C38 C39 C130 C131 = 12pF 0402 50V 5%
C40-C44 C46 C138 C155 C278 C303 = 10uF 0402 4V 20%
C47 C64 C65 C76 C95 C146-C149 = 1uF 0402 10V 20%
C101-C119 C125-C129 C132 C134-C136 C140-C145 C150-C153 C157-C176 C181 C182 C185-C187 C189 C191-C201 C203-C211 = 100nF 0201 10V 10%
C120-C124 = 1nF 0201 25V 10%
C133 C139 C156 = 1uF 0201 6.3V 20%
C183 C184 = 8pF 0402 50V 10%
C202 C271 R8 R9 R118 = NC 0402
C212 C257 = NC 0201
C232-C234 C254-C256 = 1nF 0402 50V 10%
C262 C265 C288 = 100pF 0402 50V 5%
C270 C276 = 10nF 0402 25V 10%
C273 C274 C298 C299 = 4.7uF 0603 10V 10%
D1 = BZT52C3V3
D2 = 1N5819 Schottky 40V 1A 750mV
L1 = 1uH 4A 0.047ohm 20%
L2 = 1uH 5A 0.027ohm 20%
L3 L4 = 1uH 0806 3.1A 0.054ohm 20%
L5 L6 L8 = 3.3uH 2.2A 0.114ohm 20%
L7 L9 = 240nH 5A 0.029 ohm 20%
Q1-Q4 Q7-Q10 = MOSFET N 4.9A 27mohm
Q5 = NPN 45V 300mW 500mA 100hFE
Q6 = MOSFET P -4A 31mohm
R1 R2 R6 R10-R13 R20-R29 R37 R38 R90-R93 R96 R111 R117 R122 = 10K 0402 50V 1% 1/16W
R3 R39-R42 R98 R104 R107 R109 R115 R126 = 100K 0402 50V 1% 1/16W
R4 R5 R97 R116 R123 = 100R 0402 50V 1% 1/16W
R14 R15 R80-R87 = 240R 0402 50V 1% 1/16W
R16-R19 R43 R68-R71 R76-R79 R108 = 0R 0402 50V 5% 1/16W
R30 R110 R113 R124 = 47K 0402 50V 1% 1/16W
R31 R32 = 133R 0402 50V 1% 1/16W
R33-R36 = 499R 0402 50V 1% 1/16W
R44 R45 = 0R 0603 1/10W
R46 R47 R54-R60 = 22R 0402 50V 1% 1/16W
R48 R49 R52 = 4.02K 0402 50V 1% 1/16W
R50 R106 R114 R125 = 1K 0402 50V 1% 1/16W
R51 = 1.62K 0402 50V 1% 1/16W
R53 = 6.04K 0402 50V 1% 1/10W
R61-R64 = 4K7 0402 50V 1% 1/10W
R65 = 1K5 0402 50V 1% 1/16W
R66 R67 R72-R75 = 2K2 0402 50V 1% 1/16W
R88 R89 R94 R95 = 51R 0201 25V 1% 1/20W
R99 R105 = 200K 0402 50V 1% 1/16W
R100 = 12K 0402 50V 5% 1/10W
R101 = 3.9K 0402 50V 1% 1/16W
R102 R112 = 118K 0402 50V 1% 1/16W
R103 = 39K 0402 50V 5% 1/10W
R119 = 330K 0402 50V 1% 1/16W
R120 = 33K 0402 50V 1% 1/16W
R121 = 150K 0402 50V 1% 1/16W
U1 = Rockchip RK808
U2 = Rockchip RK3399
U3-U6 = K4B4G1646E-BCMA
U7 U8 U11 = SY8088AAC/PT3409A/B
U9 = PT5108E23E-18
U10 = SYR828PKC
U12 = SYR837PKC
U13 = NCP585HSN09T1G
Y1 = 32.768kHz MC-146 7pF
Y2 = 24MHz TSX-3225 9pF

## Footprints (pads in the part's own frame, mm; a bottom-side part is the same pattern mirrored in y, then rotated)
0201C
  rect 0.3x0.3 smd: 1(0,0.3) 2(0,-0.3)
0201R
  rect 0.3x0.3 smd: 1(0,0.3) 2(0,-0.3)
0402C
  rect 0.6x0.5 smd: 1(0,-0.45) 2(0,0.45)
0402R
  rect 0.6x0.5 smd: 1(0,-0.45) 2(0,0.45)
0603C
  rect 0.5x0.9 smd: 1(-0.75,0) 2(0.75,0)
0603R
  rect 1.1x1 smd: 1(-0.85,0) 2(0.85,0)
0806L
  rect 0.55x1.6 smd: 1(0.725,0) 2(-0.725,0)
252012
  rect 0.6x1.2 smd: 1(-0.95,0) 2(0.95,0)
CSP156X196-20
  round 0.24 smd: A1(-0.6,0.8) A2(-0.2,0.8) A3(0.2,0.8) A4(0.6,0.8) B1(-0.6,0.4) B2(-0.2,0.4) B3(0.2,0.4) B4(0.6,0.4) C1(-0.6,0) C2(-0.2,0) C3(0.2,0) C4(0.6,0) D1(-0.6,-0.4) D2(-0.2,-0.4) D3(0.2,-0.4) D4(0.6,-0.4) E1(-0.6,-0.8) E2(-0.2,-0.8) E3(0.2,-0.8) E4(0.6,-0.8)
FBGA96
  round 0.356 smd: A1(-3.2,6) A2(-2.4,6) A3(-1.6,6) A7(1.6,6) A8(2.4,6) A9(3.2,6) B1(-3.2,5.2) B2(-2.4,5.2) B3(-1.6,5.2) B7(1.6,5.2) B8(2.4,5.2) B9(3.2,5.2) C1(-3.2,4.4) C2(-2.4,4.4) C3(-1.6,4.4) C7(1.6,4.4) C8(2.4,4.4) C9(3.2,4.4) D1(-3.2,3.6) D2(-2.4,3.6) D3(-1.6,3.6) D7(1.6,3.6) D8(2.4,3.6) D9(3.2,3.6) E1(-3.2,2.8) E2(-2.4,2.8) E3(-1.6,2.8) E7(1.6,2.8) E8(2.4,2.8) E9(3.2,2.8) F1(-3.2,2) F2(-2.4,2) F3(-1.6,2) F7(1.6,2) F8(2.4,2) F9(3.2,2) G1(-3.2,1.2) G2(-2.4,1.2) G3(-1.6,1.2) G7(1.6,1.2) G8(2.4,1.2) G9(3.2,1.2) H1(-3.2,0.4) H2(-2.4,0.4) H3(-1.6,0.4) H7(1.6,0.4) H8(2.4,0.4) H9(3.2,0.4) J1(-3.2,-0.4) J2(-2.4,-0.4) J3(-1.6,-0.4) J7(1.6,-0.4) J8(2.4,-0.4) J9(3.2,-0.4) K1(-3.2,-1.2) K2(-2.4,-1.2) K3(-1.6,-1.2) K7(1.6,-1.2) K8(2.4,-1.2) K9(3.2,-1.2) L1(-3.2,-2) L2(-2.4,-2) L3(-1.6,-2) L7(1.6,-2) L8(2.4,-2) L9(3.2,-2) M1(-3.2,-2.8) M2(-2.4,-2.8) M3(-1.6,-2.8) M7(1.6,-2.8) M8(2.4,-2.8) M9(3.2,-2.8) N1(-3.2,-3.6) N2(-2.4,-3.6) N3(-1.6,-3.6) N7(1.6,-3.6) N8(2.4,-3.6) N9(3.2,-3.6) P1(-3.2,-4.4) P2(-2.4,-4.4) P3(-1.6,-4.4) P7(1.6,-4.4) P8(2.4,-4.4) P9(3.2,-4.4) R1(-3.2,-5.2) R2(-2.4,-5.2) R3(-1.6,-5.2) R7(1.6,-5.2) R8(2.4,-5.2) R9(3.2,-5.2) T1(-3.2,-6) T2(-2.4,-6) T3(-1.6,-6) T7(1.6,-6) T8(2.4,-6) T9(3.2,-6)
FCBGA828
  round 0.35 smd: A1(-9.75,9.75) A2(-9.1,9.75) A3(-8.45,9.75) A4(-7.8,9.75) A5(-7.15,9.75) A6(-6.5,9.75) A7(-5.85,9.75) A8(-5.2,9.75) A9(-4.55,9.75) A10(-3.9,9.75) A11(-3.25,9.75) A12(-2.6,9.75) A13(-1.95,9.75) A14(-1.3,9.75) A15(-0.65,9.75) A16(0,9.75) A17(0.65,9.75) A18(1.3,9.75) A19(1.95,9.75) A20(2.6,9.75) A21(3.25,9.75) A22(3.9,9.75) A23(4.55,9.75) A24(5.2,9.75) A25(5.85,9.75) A26(6.5,9.75) A27(7.15,9.75) A28(7.8,9.75) A29(8.45,9.75) A30(9.1,9.75) A31(9.75,9.75) AA1(-9.75,-3.25) AA2(-9.1,-3.25) AA3(-8.45,-3.25) AA4(-7.8,-3.25) AA5(-7.15,-3.25) AA6(-6.5,-3.25) AA7(-5.85,-3.25) AA8(-5.2,-3.25) AA9(-4.55,-3.25) AA10(-3.9,-3.25) AA11(-3.25,-3.25) AA12(-2.6,-3.25) AA13(-1.95,-3.25) AA14(-1.3,-3.25) AA15(-0.65,-3.25) AA16(0,-3.25) AA17(0.65,-3.25) AA18(1.3,-3.25) AA19(1.95,-3.25) AA20(2.6,-3.25) AA21(3.25,-3.25) AA22(3.9,-3.25) AA23(4.55,-3.25) AA24(5.2,-3.25) AA25(5.85,-3.25) AA26(6.5,-3.25) AA27(7.15,-3.25) AA28(7.8,-3.25) AA29(8.45,-3.25) AA30(9.1,-3.25) AA31(9.75,-3.25) AB1(-9.75,-3.9) AB2(-9.1,-3.9) AB8(-5.2,-3.9) AB9(-4.55,-3.9) AB10(-3.9,-3.9) AB11(-3.25,-3.9) AB12(-2.6,-3.9) AB13(-1.95,-3.9) AB14(-1.3,-3.9) AB15(-0.65,-3.9) AB16(0,-3.9) AB17(0.65,-3.9) AB18(1.3,-3.9) AB19(1.95,-3.9) AB20(2.6,-3.9) AB21(3.25,-3.9) AB22(3.9,-3.9) AB23(4.55,-3.9) AB24(5.2,-3.9) AB30(9.1,-3.9) AB31(9.75,-3.9) AC1(-9.75,-4.55) AC2(-9.1,-4.55) AC3(-8.45,-4.55) AC4(-7.8,-4.55) AC5(-7.15,-4.55) AC6(-6.5,-4.55) AC7(-5.85,-4.55) AC8(-5.2,-4.55) AC9(-4.55,-4.55) AC10(-3.9,-4.55) AC11(-3.25,-4.55) AC12(-2.6,-4.55) AC13(-1.95,-4.55) AC14(-1.3,-4.55) AC15(-0.65,-4.55) AC16(0,-4.55) AC17(0.65,-4.55) AC18(1.3,-4.55) AC19(1.95,-4.55) AC20(2.6,-4.55) AC21(3.25,-4.55) AC22(3.9,-4.55) AC23(4.55,-4.55) AC24(5.2,-4.55) AC25(5.85,-4.55) AC26(6.5,-4.55) AC27(7.15,-4.55) AC28(7.8,-4.55) AC29(8.45,-4.55) AC30(9.1,-4.55) AC31(9.75,-4.55) AD1(-9.75,-5.2) AD2(-9.1,-5.2) AD3(-8.45,-5.2) AD4(-7.8,-5.2) AD5(-7.15,-5.2) AD6(-6.5,-5.2) AD7(-5.85,-5.2) AD8(-5.2,-5.2) AD9(-4.55,-5.2) AD10(-3.9,-5.2) AD11(-3.25,-5.2) AD12(-2.6,-5.2) AD13(-1.95,-5.2) AD14(-1.3,-5.2) AD15(-0.65,-5.2) AD16(0,-5.2) AD17(0.65,-5.2) AD18(1.3,-5.2) AD19(1.95,-5.2) AD20(2.6,-5.2) AD21(3.25,-5.2) AD22(3.9,-5.2) AD23(4.55,-5.2) AD24(5.2,-5.2) AD25(5.85,-5.2) AD26(6.5,-5.2) AD27(7.15,-5.2) AD28(7.8,-5.2) AD29(8.45,-5.2) AD30(9.1,-5.2) AD31(9.75,-5.2) AE1(-9.75,-5.85) AE2(-9.1,-5.85) AE5(-7.15,-5.85) AE6(-6.5,-5.85) AE8(-5.2,-5.85) AE9(-4.55,-5.85) AE11(-3.25,-5.85) AE12(-2.6,-5.85) AE14(-1.3,-5.85) AE15(-0.65,-5.85) AE17(0.65,-5.85) AE18(1.3,-5.85) AE20(2.6,-5.85) AE21(3.25,-5.85) AE23(4.55,-5.85) AE24(5.2,-5.85) AE26(6.5,-5.85) AE27(7.15,-5.85) AE30(9.1,-5.85) AE31(9.75,-5.85) AF1(-9.75,-6.5) AF2(-9.1,-6.5) AF3(-8.45,-6.5) AF4(-7.8,-6.5) AF5(-7.15,-6.5) AF7(-5.85,-6.5) AF8(-5.2,-6.5) AF9(-4.55,-6.5) AF11(-3.25,-6.5) AF12(-2.6,-6.5) AF14(-1.3,-6.5) AF15(-0.65,-6.5) AF17(0.65,-6.5) AF18(1.3,-6.5) AF20(2.6,-6.5) AF21(3.25,-6.5) AF23(4.55,-6.5) AF24(5.2,-6.5) AF25(5.85,-6.5) AF27(7.15,-6.5) AF28(7.8,-6.5) AF29(8.45,-6.5) AF30(9.1,-6.5) AF31(9.75,-6.5) AG1(-9.75,-7.15) AG2(-9.1,-7.15) AG3(-8.45,-7.15) AG4(-7.8,-7.15) AG6(-6.5,-7.15) AG7(-5.85,-7.15) AG8(-5.2,-7.15) AG9(-4.55,-7.15) AG11(-3.25,-7.15) AG12(-2.6,-7.15) AG14(-1.3,-7.15) AG15(-0.65,-7.15) AG17(0.65,-7.15) AG18(1.3,-7.15) AG20(2.6,-7.15) AG21(3.25,-7.15) AG23(4.55,-7.15) AG24(5.2,-7.15) AG25(5.85,-7.15) AG26(6.5,-7.15) AG28(7.8,-7.15) AG29(8.45,-7.15) AG30(9.1,-7.15) AG31(9.75,-7.15) AH1(-9.75,-7.8) AH2(-9.1,-7.8) AH3(-8.45,-7.8) AH5(-7.15,-7.8) AH6(-6.5,-7.8) AH8(-5.2,-7.8) AH9(-4.55,-7.8) AH11(-3.25,-7.8) AH12(-2.6,-7.8) AH14(-1.3,-7.8) AH15(-0.65,-7.8) AH17(0.65,-7.8) AH18(1.3,-7.8) AH20(2.6,-7.8) AH21(3.25,-7.8) AH23(4.55,-7.8) AH24(5.2,-7.8) AH26(6.5,-7.8) AH27(7.15,-7.8) AH29(8.45,-7.8) AH30(9.1,-7.8) AH31(9.75,-7.8) AJ1(-9.75,-8.45) AJ2(-9.1,-8.45) AJ3(-8.45,-8.45) AJ4(-7.8,-8.45) AJ5(-7.15,-8.45) AJ6(-6.5,-8.45) AJ8(-5.2,-8.45) AJ9(-4.55,-8.45) AJ11(-3.25,-8.45) AJ12(-2.6,-8.45) AJ14(-1.3,-8.45) AJ15(-0.65,-8.45) AJ17(0.65,-8.45) AJ18(1.3,-8.45) AJ20(2.6,-8.45) AJ21(3.25,-8.45) AJ23(4.55,-8.45) AJ24(5.2,-8.45) AJ26(6.5,-8.45) AJ27(7.15,-8.45) AJ28(7.8,-8.45) AJ29(8.45,-8.45) AJ30(9.1,-8.45) AJ31(9.75,-8.45) AK1(-9.75,-9.1) AK2(-9.1,-9.1) AK3(-8.45,-9.1) AK4(-7.8,-9.1) AK5(-7.15,-9.1) AK6(-6.5,-9.1) AK7(-5.85,-9.1) AK8(-5.2,-9.1) AK9(-4.55,-9.1) AK10(-3.9,-9.1) AK11(-3.25,-9.1) AK12(-2.6,-9.1) AK13(-1.95,-9.1) AK14(-1.3,-9.1) AK15(-0.65,-9.1) AK16(0,-9.1) AK17(0.65,-9.1) AK18(1.3,-9.1) AK19(1.95,-9.1) AK20(2.6,-9.1) AK21(3.25,-9.1) AK22(3.9,-9.1) AK23(4.55,-9.1) AK24(5.2,-9.1) AK25(5.85,-9.1) AK26(6.5,-9.1) AK27(7.15,-9.1) AK28(7.8,-9.1) AK29(8.45,-9.1) AK30(9.1,-9.1) AK31(9.75,-9.1) AL1(-9.75,-9.75) AL2(-9.1,-9.75) AL3(-8.45,-9.75) AL4(-7.8,-9.75) AL5(-7.15,-9.75) AL6(-6.5,-9.75) AL7(-5.85,-9.75) AL8(-5.2,-9.75) AL9(-4.55,-9.75) AL10(-3.9,-9.75) AL11(-3.25,-9.75) AL12(-2.6,-9.75) AL13(-1.95,-9.75) AL14(-1.3,-9.75) AL15(-0.65,-9.75) AL16(0,-9.75) AL17(0.65,-9.75) AL18(1.3,-9.75) AL19(1.95,-9.75) AL20(2.6,-9.75) AL21(3.25,-9.75) AL22(3.9,-9.75) AL23(4.55,-9.75) AL24(5.2,-9.75) AL25(5.85,-9.75) AL26(6.5,-9.75) AL27(7.15,-9.75) AL28(7.8,-9.75) AL29(8.45,-9.75) AL30(9.1,-9.75) AL31(9.75,-9.75) B1(-9.75,9.1) B2(-9.1,9.1) B3(-8.45,9.1) B4(-7.8,9.1) B5(-7.15,9.1) B6(-6.5,9.1) B7(-5.85,9.1) B8(-5.2,9.1) B9(-4.55,9.1) B10(-3.9,9.1) B11(-3.25,9.1) B12(-2.6,9.1) B13(-1.95,9.1) B14(-1.3,9.1) B15(-0.65,9.1) B16(0,9.1) B17(0.65,9.1) B18(1.3,9.1) B19(1.95,9.1) B20(2.6,9.1) B21(3.25,9.1) B22(3.9,9.1) B23(4.55,9.1) B24(5.2,9.1) B25(5.85,9.1) B26(6.5,9.1) B27(7.15,9.1) B28(7.8,9.1) B29(8.45,9.1) B30(9.1,9.1) B31(9.75,9.1) C1(-9.75,8.45) C2(-9.1,8.45) C3(-8.45,8.45) C4(-7.8,8.45) C5(-7.15,8.45) C6(-6.5,8.45) C8(-5.2,8.45) C9(-4.55,8.45) C11(-3.25,8.45) C12(-2.6,8.45) C14(-1.3,8.45) C15(-0.65,8.45) C17(0.65,8.45) C18(1.3,8.45) C20(2.6,8.45) C21(3.25,8.45) C23(4.55,8.45) C24(5.2,8.45) C26(6.5,8.45) C27(7.15,8.45) C28(7.8,8.45) C29(8.45,8.45) C30(9.1,8.45) C31(9.75,8.45) D1(-9.75,7.8) D2(-9.1,7.8) D3(-8.45,7.8) D5(-7.15,7.8) D6(-6.5,7.8) D8(-5.2,7.8) D9(-4.55,7.8) D11(-3.25,7.8) D12(-2.6,7.8) D14(-1.3,7.8) D15(-0.65,7.8) D17(0.65,7.8) D18(1.3,7.8) D20(2.6,7.8) D21(3.25,7.8) D23(4.55,7.8) D24(5.2,7.8) D26(6.5,7.8) D27(7.15,7.8) D29(8.45,7.8) D30(9.1,7.8) D31(9.75,7.8) E1(-9.75,7.15) E2(-9.1,7.15) E3(-8.45,7.15) E4(-7.8,7.15) E6(-6.5,7.15) E7(-5.85,7.15) E8(-5.2,7.15) E9(-4.55,7.15) E11(-3.25,7.15) E12(-2.6,7.15) E14(-1.3,7.15) E15(-0.65,7.15) E17(0.65,7.15) E18(1.3,7.15) E20(2.6,7.15) E21(3.25,7.15) E23(4.55,7.15) E24(5.2,7.15) E25(5.85,7.15) E26(6.5,7.15) E28(7.8,7.15) E29(8.45,7.15) E30(9.1,7.15) E31(9.75,7.15) F1(-9.75,6.5) F2(-9.1,6.5) F3(-8.45,6.5) F4(-7.8,6.5) F5(-7.15,6.5) F7(-5.85,6.5) F8(-5.2,6.5) F9(-4.55,6.5) F11(-3.25,6.5) F12(-2.6,6.5) F14(-1.3,6.5) F15(-0.65,6.5) F17(0.65,6.5) F18(1.3,6.5) F20(2.6,6.5) F21(3.25,6.5) F23(4.55,6.5) F24(5.2,6.5) F25(5.85,6.5) F27(7.15,6.5) F28(7.8,6.5) F29(8.45,6.5) F30(9.1,6.5) F31(9.75,6.5) G1(-9.75,5.85) G2(-9.1,5.85) G5(-7.15,5.85) G6(-6.5,5.85) G8(-5.2,5.85) G9(-4.55,5.85) G11(-3.25,5.85) G12(-2.6,5.85) G14(-1.3,5.85) G15(-0.65,5.85) G17(0.65,5.85) G18(1.3,5.85) G20(2.6,5.85) G21(3.25,5.85) G23(4.55,5.85) G24(5.2,5.85) G26(6.5,5.85) G27(7.15,5.85) G30(9.1,5.85) G31(9.75,5.85) H1(-9.75,5.2) H2(-9.1,5.2) H3(-8.45,5.2) H4(-7.8,5.2) H5(-7.15,5.2) H6(-6.5,5.2) H7(-5.85,5.2) H9(-4.55,5.2) H10(-3.9,5.2) H11(-3.25,5.2) H12(-2.6,5.2) H13(-1.95,5.2) H14(-1.3,5.2) H15(-0.65,5.2) H16(0,5.2) H17(0.65,5.2) H18(1.3,5.2) H19(1.95,5.2) H20(2.6,5.2) H21(3.25,5.2) H22(3.9,5.2) H23(4.55,5.2) H24(5.2,5.2) H25(5.85,5.2) H26(6.5,5.2) H27(7.15,5.2) H28(7.8,5.2) H29(8.45,5.2) H30(9.1,5.2) H31(9.75,5.2) J1(-9.75,4.55) J2(-9.1,4.55) J3(-8.45,4.55) J4(-7.8,4.55) J5(-7.15,4.55) J6(-6.5,4.55) J7(-5.85,4.55) J8(-5.2,4.55) J9(-4.55,4.55) J10(-3.9,4.55) J11(-3.25,4.55) J12(-2.6,4.55) J13(-1.95,4.55) J14(-1.3,4.55) J15(-0.65,4.55) J16(0,4.55) J17(0.65,4.55) J18(1.3,4.55) J19(1.95,4.55) J20(2.6,4.55) J21(3.25,4.55) J22(3.9,4.55) J23(4.55,4.55) J24(5.2,4.55) J25(5.85,4.55) J26(6.5,4.55) J27(7.15,4.55) J28(7.8,4.55) J29(8.45,4.55) J30(9.1,4.55) J31(9.75,4.55) K1(-9.75,3.9) K2(-9.1,3.9) K8(-5.2,3.9) K9(-4.55,3.9) K10(-3.9,3.9) K11(-3.25,3.9) K12(-2.6,3.9) K13(-1.95,3.9) K14(-1.3,3.9) K15(-0.65,3.9) K16(0,3.9) K17(0.65,3.9) K18(1.3,3.9) K19(1.95,3.9) K20(2.6,3.9) K21(3.25,3.9) K22(3.9,3.9) K23(4.55,3.9) K24(5.2,3.9) K30(9.1,3.9) K31(9.75,3.9) L1(-9.75,3.25) L2(-9.1,3.25) L3(-8.45,3.25) L4(-7.8,3.25) L5(-7.15,3.25) L6(-6.5,3.25) L7(-5.85,3.25) L8(-5.2,3.25) L9(-4.55,3.25) L10(-3.9,3.25) L11(-3.25,3.25) L12(-2.6,3.25) L13(-1.95,3.25) L14(-1.3,3.25) L15(-0.65,3.25) L16(0,3.25) L17(0.65,3.25) L18(1.3,3.25) L19(1.95,3.25) L20(2.6,3.25) L21(3.25,3.25) L22(3.9,3.25) L23(4.55,3.25) L24(5.2,3.25) L25(5.85,3.25) L26(6.5,3.25) L27(7.15,3.25) L28(7.8,3.25) L29(8.45,3.25) L30(9.1,3.25) L31(9.75,3.25) M1(-9.75,2.6) M2(-9.1,2.6) M3(-8.45,2.6) M4(-7.8,2.6) M5(-7.15,2.6) M6(-6.5,2.6) M7(-5.85,2.6) M8(-5.2,2.6) M9(-4.55,2.6) M10(-3.9,2.6) M11(-3.25,2.6) M12(-2.6,2.6) M13(-1.95,2.6) M14(-1.3,2.6) M15(-0.65,2.6) M16(0,2.6) M17(0.65,2.6) M18(1.3,2.6) M19(1.95,2.6) M20(2.6,2.6) M21(3.25,2.6) M22(3.9,2.6) M23(4.55,2.6) M24(5.2,2.6) M25(5.85,2.6) M26(6.5,2.6) M27(7.15,2.6) M28(7.8,2.6) M29(8.45,2.6) M30(9.1,2.6) M31(9.75,2.6) N1(-9.75,1.95) N2(-9.1,1.95) N8(-5.2,1.95) N9(-4.55,1.95) N10(-3.9,1.95) N11(-3.25,1.95) N12(-2.6,1.95) N13(-1.95,1.95) N14(-1.3,1.95) N15(-0.65,1.95) N16(0,1.95) N17(0.65,1.95) N18(1.3,1.95) N19(1.95,1.95) N20(2.6,1.95) N21(3.25,1.95) N22(3.9,1.95) N23(4.55,1.95) N24(5.2,1.95) N30(9.1,1.95) N31(9.75,1.95) P1(-9.75,1.3) P2(-9.1,1.3) P3(-8.45,1.3) P4(-7.8,1.3) P5(-7.15,1.3) P6(-6.5,1.3) P7(-5.85,1.3) P8(-5.2,1.3) P9(-4.55,1.3) P10(-3.9,1.3) P11(-3.25,1.3) P12(-2.6,1.3) P13(-1.95,1.3) P14(-1.3,1.3) P15(-0.65,1.3) P16(0,1.3) P17(0.65,1.3) P18(1.3,1.3) P19(1.95,1.3) P20(2.6,1.3) P21(3.25,1.3) P22(3.9,1.3) P23(4.55,1.3) P24(5.2,1.3) P25(5.85,1.3) P26(6.5,1.3) P27(7.15,1.3) P28(7.8,1.3) P29(8.45,1.3) P30(9.1,1.3) P31(9.75,1.3) R1(-9.75,0.65) R2(-9.1,0.65) R3(-8.45,0.65) R4(-7.8,0.65) R5(-7.15,0.65) R6(-6.5,0.65) R7(-5.85,0.65) R8(-5.2,0.65) R9(-4.55,0.65) R10(-3.9,0.65) R11(-3.25,0.65) R12(-2.6,0.65) R13(-1.95,0.65) R14(-1.3,0.65) R15(-0.65,0.65) R16(0,0.65) R17(0.65,0.65) R18(1.3,0.65) R19(1.95,0.65) R20(2.6,0.65) R21(3.25,0.65) R22(3.9,0.65) R23(4.55,0.65) R24(5.2,0.65) R25(5.85,0.65) R26(6.5,0.65) R27(7.15,0.65) R28(7.8,0.65) R29(8.45,0.65) R30(9.1,0.65) R31(9.75,0.65) T1(-9.75,0) T2(-9.1,0) T8(-5.2,0) T9(-4.55,0) T10(-3.9,0) T11(-3.25,0) T12(-2.6,0) T13(-1.95,0) T14(-1.3,0) T15(-0.65,0) T16(0,0) T17(0.65,0) T18(1.3,0) T19(1.95,0) T20(2.6,0) T21(3.25,0) T22(3.9,0) T23(4.55,0) T24(5.2,0) T30(9.1,0) T31(9.75,0) U1(-9.75,-0.65) U2(-9.1,-0.65) U3(-8.45,-0.65) U4(-7.8,-0.65) U5(-7.15,-0.65) U6(-6.5,-0.65) U7(-5.85,-0.65) U8(-5.2,-0.65) U9(-4.55,-0.65) U10(-3.9,-0.65) U11(-3.25,-0.65) U12(-2.6,-0.65) U13(-1.95,-0.65) U14(-1.3,-0.65) U15(-0.65,-0.65) U16(0,-0.65) U17(0.65,-0.65) U18(1.3,-0.65) U19(1.95,-0.65) U20(2.6,-0.65) U21(3.25,-0.65) U22(3.9,-0.65) U23(4.55,-0.65) U24(5.2,-0.65) U25(5.85,-0.65) U26(6.5,-0.65) U27(7.15,-0.65) U28(7.8,-0.65) U29(8.45,-0.65) U30(9.1,-0.65) U31(9.75,-0.65) V1(-9.75,-1.3) V2(-9.1,-1.3) V3(-8.45,-1.3) V4(-7.8,-1.3) V5(-7.15,-1.3) V6(-6.5,-1.3) V7(-5.85,-1.3) V8(-5.2,-1.3) V9(-4.55,-1.3) V10(-3.9,-1.3) V11(-3.25,-1.3) V12(-2.6,-1.3) V13(-1.95,-1.3) V14(-1.3,-1.3) V15(-0.65,-1.3) V16(0,-1.3) V17(0.65,-1.3) V18(1.3,-1.3) V19(1.95,-1.3) V20(2.6,-1.3) V21(3.25,-1.3) V22(3.9,-1.3) V23(4.55,-1.3) V24(5.2,-1.3) V25(5.85,-1.3) V26(6.5,-1.3) V27(7.15,-1.3) V28(7.8,-1.3) V29(8.45,-1.3) V30(9.1,-1.3) V31(9.75,-1.3) W1(-9.75,-1.95) W2(-9.1,-1.95) W8(-5.2,-1.95) W9(-4.55,-1.95) W10(-3.9,-1.95) W11(-3.25,-1.95) W12(-2.6,-1.95) W13(-1.95,-1.95) W14(-1.3,-1.95) W15(-0.65,-1.95) W16(0,-1.95) W17(0.65,-1.95) W18(1.3,-1.95) W19(1.95,-1.95) W20(2.6,-1.95) W21(3.25,-1.95) W22(3.9,-1.95) W23(4.55,-1.95) W24(5.2,-1.95) W30(9.1,-1.95) W31(9.75,-1.95) Y1(-9.75,-2.6) Y2(-9.1,-2.6) Y3(-8.45,-2.6) Y4(-7.8,-2.6) Y5(-7.15,-2.6) Y6(-6.5,-2.6) Y7(-5.85,-2.6) Y8(-5.2,-2.6) Y9(-4.55,-2.6) Y10(-3.9,-2.6) Y11(-3.25,-2.6) Y12(-2.6,-2.6) Y13(-1.95,-2.6) Y14(-1.3,-2.6) Y15(-0.65,-2.6) Y16(0,-2.6) Y17(0.65,-2.6) Y18(1.3,-2.6) Y19(1.95,-2.6) Y20(2.6,-2.6) Y21(3.25,-2.6) Y22(3.9,-2.6) Y23(4.55,-2.6) Y24(5.2,-2.6) Y25(5.85,-2.6) Y26(6.5,-2.6) Y27(7.15,-2.6) Y28(7.8,-2.6) Y29(8.45,-2.6) Y30(9.1,-2.6) Y31(9.75,-2.6)
MC-146
  rect 1.2x0.6 smd: 1(-3.15,-0.45) 2(3.15,-0.45) 3(3.15,0.45) 4(-3.15,0.45)
QFN68_7X7
  oval 0.5x0.15 smd: 1(-3.45,2.8) 2(-3.45,2.45) 3(-3.45,2.1) 4(-3.45,1.75) 5(-3.45,1.4) 6(-3.45,1.05) 7(-3.45,0.7) 8(-3.45,0.35) 9(-3.45,0) 10(-3.45,-0.35) 11(-3.45,-0.7) 12(-3.45,-1.05) 13(-3.45,-1.4) 14(-3.45,-1.75) 15(-3.45,-2.1) 16(-3.45,-2.45) 17(-3.45,-2.8) 35(3.45,-2.8) 36(3.45,-2.45) 37(3.45,-2.1) 38(3.45,-1.75) 39(3.45,-1.4) 40(3.45,-1.05) 41(3.45,-0.7) 42(3.45,-0.35) 43(3.45,0) 44(3.45,0.35) 45(3.45,0.7) 46(3.45,1.05) 47(3.45,1.4) 48(3.45,1.75) 49(3.45,2.1) 50(3.45,2.45) 51(3.45,2.8)
  oval 0.15x0.5 smd: 18(-2.8,-3.45) 19(-2.45,-3.45) 20(-2.1,-3.45) 21(-1.75,-3.45) 22(-1.4,-3.45) 23(-1.05,-3.45) 24(-0.7,-3.45) 25(-0.35,-3.45) 26(0,-3.45) 27(0.35,-3.45) 28(0.7,-3.45) 29(1.05,-3.45) 30(1.4,-3.45) 31(1.75,-3.45) 32(2.1,-3.45) 33(2.45,-3.45) 34(2.8,-3.45) 52(2.8,3.45) 53(2.45,3.45) 54(2.1,3.45) 55(1.75,3.45) 56(1.4,3.45) 57(1.05,3.45) 58(0.7,3.45) 59(0.35,3.45) 60(0,3.45) 61(-0.35,3.45) 62(-0.7,3.45) 63(-1.05,3.45) 64(-1.4,3.45) 65(-1.75,3.45) 66(-2.1,3.45) 67(-2.45,3.45) 68(-2.8,3.45)
  rect 5.49x5.49 smd: 69(0,0)
SOD-123
  rect 0.91x1.22 smd: 1(-1.85,0) 2(1.85,0)
SOT23
  rect 0.64x1.2 smd: 1(-0.95,-1.217) 2(0.95,-1.217) 3(0,1.217)
SOT23-5
  rect 0.64x1.2 smd: 1(0.95,1.217) 2(0,1.217) 3(-0.95,1.217) 4(-0.95,-1.217) 5(0.95,-1.217)
SOT-23
  rect 0.64x1.2 smd: 1(-0.95,-1.217) 2(0.95,-1.217) 3(0,1.217)
TSX-3225
  rect 1.4x1.15 smd: 1(-1.1,-0.8) 2(1.1,-0.8) 3(1.1,0.8) 4(-1.1,0.8)
WLCSP-20-P1
  round 0.265 smd: A1(-0.6,1) A2(-0.2,1) A3(0.2,1) A4(0.6,1) B1(-0.6,0.5) B2(-0.2,0.5) B3(0.2,0.5) B4(0.6,0.5) C1(-0.6,0) C2(-0.2,0) C3(0.2,0) C4(0.6,0) D1(-0.6,-0.5) D2(-0.2,-0.5) D3(0.2,-0.5) D4(0.6,-0.5) E1(-0.6,-1) E2(-0.2,-1) E3(0.2,-1) E4(0.6,-1)
WURTH_3015
  rect 1.3x3.4 smd: 1(-1.05,0) 2(1.05,0)
WURTH_4012
  rect 1.5x2.3 smd: 1(-1.85,0) 2(1.85,0)
WURTH_4020
  rect 1.5x2.4 smd: 1(1.85,0) 2(-1.85,0)

## Nets
AVDD0V9_DDR0PLL: C150.1 R16.2 U2.R8(DDR0PLL_AVDD_0V9)
AVDD0V9_DDR1PLL: C151.1 R17.2 U2.H14(DDR1PLL_AVDD_0V9)
GND: C1.1 C2.2 C3.2 C4.1 C5.2 C6.2 C7.1 C8.1 C9.1 C10.1 C11.1 C12.1 C13.1 C14.1 C15.1 C16.2 C17.2 C18.2 C19.2 C20.2 C21.2 C22.2 C23.2 C24.2 C25.2 C26.2 C27.2 C28.2 C29.2 C30.2 C31.2 C32.1 C33.1 C36.2 C37.1 C38.2 C39.2 C40.2 C41.2 C42.2 C43.2 C44.2 C45.2 C46.2 C47.2 C53.2 C54.2 C61.2 C62.2 C63.2 C64.2 C65.2 C72.2 C73.2 C74.2 C75.2 C76.2 C82.2 C83.2 C84.2 C87.2 C88.2 C89.2 C90.2 C91.2 C92.2 C93.2 C94.2 C95.2 C101.2 C102.2 C103.2 C104.2 C105.2 C106.2 C107.2 C108.2 C109.2 C110.2 C111.2 C112.2 C113.2 C114.2 C115.2 C116.2 C117.2 C118.2 C119.2 C120.2 C121.2 C122.2 C123.2 C124.2 C125.2 C126.2 C127.2 C128.2 C129.1 C130.2 C131.2 C132.2 C133.2 C134.2 C135.2 C136.2 C137.2 C138.2 C139.2 C140.2 C141.2 C142.2 C143.2 C144.2 C145.2 C146.2 C147.2 C148.2 C149.2 C150.2 C151.2 C152.2 C153.2 C154.2 C155.2 C156.2 C157.2 C158.2 C159.2 C160.2 C161.2 C162.2 C163.2 C164.2 C165.2 C166.2 C167.2 C168.2 C169.2 C170.2 C171.2 C172.2 C173.2 C174.2 C175.2 C176.2 C177.2 C178.2 C179.2 C180.2 C181.2 C182.2 C183.2 C184.2 C185.2 C186.2 C187.2 C188.2 C189.2 C190.2 C191.2 C200.2 C201.2 C202.2 C203.2 C204.2 C205.2 C206.2 C207.2 C208.2 C209.2 C210.2 C211.2 C212.2 C213.2 C214.2 C215.2 C216.2 C217.2 C218.2 C219.2 C220.2 C221.2 C222.2 C223.2 C224.2 C225.2 C226.2 C227.2 C228.2 C229.2 C231.2 C232.2 C233.2 C234.2 C235.2 C236.2 C237.2 C238.2 C239.2 C240.2 C241.2 C242.2 C243.2 C244.2 C245.2 C246.2 C247.2 C248.2 C249.2 C250.2 C251.2 C253.2 C254.2 C255.2 C256.2 C257.2 C258.2 C259.2 C260.2 C261.2 C263.2 C264.2 C265.2 C266.2 C267.2 C268.2 C269.2 C270.2 C272.2 C273.2 C274.2 C275.2 C276.2 C277.2 C278.2 C279.2 C280.2 C281.2 C282.2 C283.2 C284.2 C285.2 C286.2 C287.2 C289.2 C290.2 C291.2 C292.2 C293.2 C294.2 C295.2 C296.2 C297.2 C298.2 C299.2 C300.2 C302.2 C303.2 C304.2 D1.2 Q4.2(S) Q5.2(E) Q8.2(S) Q10.2(S) R3.2 R9.2 R14.1 R15.1 R20.2 R30.1 R31.2 R32.2 R33.2 R34.2 R35.2 R36.2 R40.2 R42.2 R48.2 R49.2 R50.2 R51.2 R52.2 R53.2 R80.1 R81.1 R82.1 R83.1 R84.1 R85.1 R86.1 R87.1 R91.1 R93.1 R99.1 R100.1 R105.1 R110.1 R112.1 R120.1 U1.21(DVS2) U1.22(DVS1) U1.27(GND2) U1.28(GND2.) U1.30(AGND) U1.38(DGND) U1.40(GND1) U1.41(GND1.) U1.46(GND5) U1.57(GND3) U1.62(GND4) U1.64(VREFGND) U1.69(GNDPAD) U2.A1(VSS_1) U2.A27(VSS_2) U2.A31(VSS_3) U2.AA3(VSS_4) U2.AA5(VSS_5) U2.AA9(VSS_6) U2.AA10(VSS_179) U2.AA11(AVSS_13) U2.AA12(AVSS_17) U2.AA13(VSS_177) U2.AA14(AVSS_26) U2.AA15(AVSS_53) U2.AA23(AVSS_4) U2.AA26(AVSS_6) U2.AA29(AVSS_7) U2.AB9(VSS_9) U2.AB10(AVSS_12) U2.AB11(AVSS_8) U2.AB13(AVSS_9) U2.AB15(AVSS_42) U2.AB16(AVSS_41) U2.AB17(AVSS_52) U2.AB19(VSS_140) U2.AB23(AVSS_5) U2.AC3(VSS_16) U2.AC11(AVSS_44) U2.AC13(AVSS_45) U2.AC15(AVSS_10) U2.AC16(AVSS_18) U2.AC17(AVSS_43) U2.AC18(VSS_145) U2.AC20(VSS_13) U2.AC21(VSS_132) U2.AC22(VSS_12) U2.AC23(AVSS_19) U2.AC25(AVSS_51) U2.AC26(AVSS_14) U2.AC29(AVSS_15) U2.AD3(VSS_17) U2.AD5(VSS_18) U2.AD10(VSS_19) U2.AD13(AVSS_11) U2.AD17(AVSS_16) U2.AD21(VSS_163) U2.AD22(VSS_11) U2.AD26(AVSS_40) U2.AD29(AVSS_20) U2.AE11(AVSS_21) U2.AE12(AVSS_22) U2.AE14(AVSS_23) U2.AE17(AVSS_24) U2.AE23(VSS_14) U2.AE27(AVSS_25) U2.AF9(VSS_20) U2.AF17(AVSS_27) U2.AF18(VSS_7) U2.AF20(VSS_10) U2.AF23(AVSS_2) U2.AF24(AVSS_3) U2.AF29(AVSS_28) U2.AG2(VSS_21) U2.AG29(AVSS_29) U2.AH29(AVSS_30) U2.AJ5(VSS_22) U2.AJ6(AVSS_31) U2.AJ8(AVSS_32) U2.AJ9(AVSS_33) U2.AJ11(AVSS_34) U2.AJ12(AVSS_35) U2.AJ14(AVSS_36) U2.AJ15(AVSS_37) U2.AJ17(AVSS_38) U2.AJ18(AVSS_39) U2.AJ20(VSS_180) U2.AJ21(VSS_172) U2.AJ23(VSS_173) U2.AJ24(VSS_174) U2.AJ26(VSS_175) U2.AJ27(VSS_176) U2.AJ28(VSS_171) U2.AJ29(AVSS_47) U2.AL1(VSS_23) U2.AL31(VSS_178) U2.B5(VSS_24) U2.B31(EDP_AVSS_1) U2.C8(VSS_25) U2.C9(VSS_26) U2.C11(VSS_27) U2.C12(VSS_28) U2.C14(VSS_29) U2.C15(VSS_30) U2.C17(VSS_31) U2.C18(VSS_32) U2.C20(VSS_33) U2.C21(VSS_34) U2.C23(VSS_35) U2.C24(VSS_36) U2.C26(VSS_37) U2.C28(EDP_AVSS_2) U2.C29(EDP_AVSS_3) U2.D5(VSS_38) U2.D29(EDP_AVSS_4) U2.E2(VSS_39) U2.E4(VSS_40) U2.E7(VSS_41) U2.E12(VSS_42) U2.E15(VSS_43) U2.E18(VSS_44) U2.E21(VSS_45) U2.E24(VSS_46) U2.E31(VSS_47) U2.F8(VSS_48) U2.F15(VSS_49) U2.F18(VSS_50) U2.F20(VSS_51) U2.F21(VSS_52) U2.G5(VSS_53) U2.G9(VSS_54) U2.G18(VSS_55) U2.G27(VSS_56) U2.H3(VSS_57) U2.H9(VSS_58) U2.H10(VSS_59) U2.H11(VSS_60) U2.H12(VSS_61) U2.H13(VSS_62) U2.H15(VSS_63) U2.H16(VSS_64) U2.H17(VSS_65) U2.H18(VSS_66) U2.H19(EDP_AVSS_5) U2.H26(VSS_67) U2.J3(VSS_68) U2.J6(VSS_69) U2.J7(VSS_70) U2.J8(VSS_71) U2.J9(VSS_72) U2.J10(VSS_73) U2.J21(EDP_AVSS_6) U2.K8(VSS_74) U2.K9(VSS_75) U2.K10(VSS_76) U2.K12(VSS_77) U2.K14(VSS_78) U2.K16(VSS_79) U2.K18(VSS_80) U2.K20(VSS_82) U2.K22(VSS_84) U2.L3(VSS_85) U2.L6(VSS_86) U2.L8(VSS_87) U2.L11(VSS_88) U2.L12(VSS_89) U2.L13(VSS_90) U2.L14(VSS_91) U2.L15(VSS_92) U2.L16(VSS_93) U2.L20(VSS_96) U2.L22(VSS_97) U2.L27(VSS_99) U2.M3(VSS_100) U2.M8(VSS_101) U2.M10(VSS_102) U2.M16(VSS_103) U2.M23(VSS_104) U2.N8(VSS_105) U2.N13(VSS_108) U2.N14(VSS_109) U2.N15(VSS_110) U2.N16(VSS_111) U2.N17(VSS_94) U2.N19(VSS_83) U2.N21(VSS_98) U2.P3(VSS_112) U2.P6(VSS_113) U2.P7(VSS_114) U2.P8(VSS_115) U2.P10(VSS_116) U2.P11(VSS_106) U2.P12(VSS_107) U2.P16(VSS_117) U2.P17(PLL_AVSS) U2.P19(VSS_119) U2.P21(VSS_121) U2.R3(VSS_123) U2.R5(VSS_124) U2.R6(VSS_125) U2.R14(VSS_129) U2.R15(VSS_130) U2.R16(VSS_131) U2.R18(VSS_165) U2.R21(VSS_120) U2.R23(VSS_133) U2.T8(VSS_134) U2.T10(VSS_135) U2.T16(VSS_138) U2.T18(VSS_168) U2.T19(VSS_122) U2.T21(VSS_139) U2.U3(VSS_141) U2.U8(VSS_142) U2.U11(VSS_126) U2.U12(VSS_127) U2.U14(VSS_137) U2.U15(VSS_143) U2.U16(VSS_144) U2.U19(VSS_146) U2.U21(VSS_147) U2.U22(VSS_149) U2.U23(AVSS_49) U2.U29(VSS_150) U2.V3(VSS_151) U2.V5(VSS_152) U2.V8(VSS_153) U2.V10(VSS_154) U2.V17(VSS_148) U2.V23(AVSS_50) U2.W8(VSS_161) U2.W9(VSS_162) U2.W13(VSS_128) U2.W17(VSS_159) U2.W18(VSS_169) U2.W19(VSS_167) U2.W21(VSS_81) U2.W22(VSS_158) U2.W23(AVSS_46) U2.W30(VSS_160) U2.Y3(VSS_8) U2.Y9(VSS_166) U2.Y10(VSS_15) U2.Y11(VSS_155) U2.Y12(VSS_136) U2.Y13(VSS_164) U2.Y14(VSS_156) U2.Y15(VSS_157) U2.Y16(VSS_118) U2.Y17(VSS_95) U2.Y20(VSS_170) U2.Y23(AVSS_1) U2.Y29(AVSS_48) U3.A9(VSS1) U3.B1(VSSQ1) U3.B3(VSS2) U3.B9(VSSQ2) U3.D1(VSSQ3) U3.D8(VSSQ4) U3.E1(VSS3) U3.E2(VSSQ5) U3.E8(VSSQ6) U3.F9(VSSQ7) U3.G1(VSSQ8) U3.G8(VSS4) U3.G9(VSSQ9) U3.J2(VSS5) U3.J8(VSS6) U3.M1(VSS7) U3.M9(VSS8) U3.P1(VSS9) U3.P9(VSS10) U3.T1(VSS11) U3.T9(VSS12) U4.A9(VSS1) U4.B1(VSSQ1) U4.B3(VSS2) U4.B9(VSSQ2) U4.D1(VSSQ3) U4.D8(VSSQ4) U4.E1(VSS3) U4.E2(VSSQ5) U4.E8(VSSQ6) U4.F9(VSSQ7) U4.G1(VSSQ8) U4.G8(VSS4) U4.G9(VSSQ9) U4.J2(VSS5) U4.J8(VSS6) U4.M1(VSS7) U4.M9(VSS8) U4.P1(VSS9) U4.P9(VSS10) U4.T1(VSS11) U4.T9(VSS12) U5.A9(VSS1) U5.B1(VSSQ1) U5.B3(VSS2) U5.B9(VSSQ2) U5.D1(VSSQ3) U5.D8(VSSQ4) U5.E1(VSS3) U5.E2(VSSQ5) U5.E8(VSSQ6) U5.F9(VSSQ7) U5.G1(VSSQ8) U5.G8(VSS4) U5.G9(VSSQ9) U5.J2(VSS5) U5.J8(VSS6) U5.M1(VSS7) U5.M9(VSS8) U5.P1(VSS9) U5.P9(VSS10) U5.T1(VSS11) U5.T9(VSS12) U6.A9(VSS1) U6.B1(VSSQ1) U6.B3(VSS2) U6.B9(VSSQ2) U6.D1(VSSQ3) U6.D8(VSSQ4) U6.E1(VSS3) U6.E2(VSSQ5) U6.E8(VSSQ6) U6.F9(VSSQ7) U6.G1(VSSQ8) U6.G8(VSS4) U6.G9(VSSQ9) U6.J2(VSS5) U6.J8(VSS6) U6.M1(VSS7) U6.M9(VSS8) U6.P1(VSS9) U6.P9(VSS10) U6.T1(VSS11) U6.T9(VSS12) U7.2(GND) U8.2(GND) U9.2(GND) U10.B2(GND1) U10.B3(GND2) U10.B4(AGND) U10.C1(GND3) U10.C2(GND4) U10.C3(GND5) U10.C4(GND6) U11.2(GND) U12.B2(GND1) U12.B3(GND2) U12.B4(AGND) U12.C1(GND3) U12.C2(GND4) U12.C3(GND5) U12.C4(GND6) U13.2(GND) Y1.3 Y1.4 Y2.2 Y2.4
VCC0V9_S3: C163.1 C268.1 C269.1 Q3.2(S) U2.L24(EMMC_COREDLL_0V9)
VCC1V8: Q7.3(D)
VCC1V8_CODEC: C23.1 U1.5(VLDO7)
VCC1V8_DVP: C20.1 R44.2 R45.2 U1.31(VLDO1)
VCC1V8_PMUPLL: C22.1 Q1.1(G) Q2.1(G) R10.2 R12.2 U1.3(VLDO3)
VCC1V8_S3: C164.1 C185.1 C186.1 C204.1 C274.1 C277.1 C278.1 Q7.2(S) R1.2 R2.2 R21.1 R22.1 R23.1 R24.1 R25.1 R26.1 R27.1 R28.1 R29.1 R96.1 R103.1 R113.2 U2.AB14(MIPI_RX0_AVDD_1V8) U2.AC10(MIPI_TX1/RX1_AVDD_1V8) U2.J22(APIO1_VDDPST) U2.K24(EMMC_VDD_1V8) U9.5(OUT)
VCC2V8_DVP: C21.1 U1.33(VLDO2)
VCC3V3_S0: C29.1 U1.11(VSWOUT2)
VCC3V3_S3: C28.1 C169.1 C172.1 C175.1 C203.1 U1.7(VSWOUT1) U2.AB18(TYPEC0_AVDD_3V3) U2.AB21(TYPEC1_AVDD_3V3) U2.J23(APIO1_VDD) U2.Y25(USB_AVDD_3V3)
VCC3V3_SYS: C273.1 C288.1 C289.1 C290.1 L8.2 R107.1 R115.1 R121.2 R126.1 U9.1(IN)
VCC3V3_SYST: C13.2 C14.2 U1.8(VCC8) U1.10(VCC12)
VCC5V0_HOST_EN: U2.R25(GPIO1_A0/ISP0_SHUTTER_EN/ISP1_S)
VCC5V0_TYPEC0_EN: U2.R27(GPIO1_A3/ISP0_FLASHTRIGOUT/ISP1)
VCC_0V9: C136.1 C265.1 C266.1 C267.1 L6.2 Q3.3(D) R104.2 U2.T24(PMU_VDD_0V9)
VCC_1V5: C26.1 C208.1 C210.1 U1.2(VLDO6) U2.AC8(APIO4_VDDPST) U2.N23(PMUIO2_VDDPST)
VCC_1V8: C16.1 C205.1 C298.1 L3.2 R101.1 R117.2 R122.2 U1.63(VFB4) U2.AB8(APIO3_VDD_1V8) U13.1(VIN) U13.4(ECO)
VCC_1V8_PMUPLL: C135.1 R8.2 U2.R24(PMUIO1_VDD_1V8)
VCC_1V8_S3: R124.1
VCC_3V0: C15.2 C27.1 C209.1 C211.1 R13.2 R72.2 R73.2 R74.2 R75.2 U1.15(VLDO8) U1.17(VDDIO) U2.AC9(APIO4_VDD) U2.P23(PMUIO2_VDD)
VCC_DDR: C18.1 C19.1 C37.2 C137.1 C138.1 C139.1 C140.1 C141.1 C142.1 C143.1 C144.1 C145.1 C148.1 C149.1 C154.1 C155.1 C156.1 C157.1 C158.1 C159.1 C160.1 C161.1 C162.1 C213.1 C214.1 C215.1 C216.1 C217.1 C218.1 C219.1 C230.1 C235.1 C236.1 C237.1 C238.1 C239.1 C240.1 C241.1 C252.1 L4.2 Q9.3(D) R18.1 R19.1 R90.2 R92.2 U2.J11(DDR1_VDD_1) U2.J12(DDR1_VDD_2) U2.J13(DDR1_VDD_3) U2.J14(DDR1_VDD_4) U2.J15(DDR1_VDD_5) U2.J16(DDR1_VDD_6) U2.J17(DDR1_VDD_7) U2.J18(DDR1_VDD_8) U2.K11(DDR1_VDD_9) U2.K13(DDR1_VDD_10) U2.K15(DDR1_VDD_11) U2.K17(DDR1_VDD_12) U2.L9(DDR0_VDD_1) U2.L10(DDR0_VDD_2) U2.M9(DDR0_VDD_3) U2.N9(DDR0_VDD_4) U2.N10(DDR0_VDD_5) U2.P9(DDR0_VDD_6) U2.R9(DDR0_VDD_7) U2.R10(DDR0_VDD_8) U2.T9(DDR0_VDD_9) U2.U9(DDR0_VDD_10) U2.U10(DDR0_VDD_11) U2.V9(DDR0_VDD_12) U3.B2(VDD1) U3.D9(VDD2) U3.G7(VDD3) U3.K2(VDD4) U3.K8(VDD5) U3.N1(VDD6) U3.N9(VDD7) U3.R1(VDD8) U3.R9(VDD9) U4.B2(VDD1) U4.D9(VDD2) U4.G7(VDD3) U4.K2(VDD4) U4.K8(VDD5) U4.N1(VDD6) U4.N9(VDD7) U4.R1(VDD8) U4.R9(VDD9) U5.B2(VDD1) U5.D9(VDD2) U5.G7(VDD3) U5.K2(VDD4) U5.K8(VDD5) U5.N1(VDD6) U5.N9(VDD7) U5.R1(VDD8) U5.R9(VDD9) U6.B2(VDD1) U6.D9(VDD2) U6.G7(VDD3) U6.K2(VDD4) U6.K8(VDD5) U6.N1(VDD6) U6.N9(VDD7) U6.R1(VDD8) U6.R9(VDD9)
VCC_DDR0_CLK: C152.1 R18.2
VCC_DDR1_CLK: C153.1 R19.2
VCC_DDRC: C220.1 C221.1 C222.1 C223.1 C224.1 C225.1 C226.1 C227.1 C228.1 C229.1 C242.1 C243.1 C244.1 C245.1 C246.1 C247.1 C248.1 C249.1 C250.1 C251.1 C302.1 C303.1 Q9.2(S) U3.A1(VDDQ1) U3.A8(VDDQ2) U3.C1(VDDQ3) U3.C9(VDDQ4) U3.D2(VDDQ5) U3.E9(VDDQ6) U3.F1(VDDQ7) U3.H2(VDDQ8) U3.H9(VDDQ9) U4.A1(VDDQ1) U4.A8(VDDQ2) U4.C1(VDDQ3) U4.C9(VDDQ4) U4.D2(VDDQ5) U4.E9(VDDQ6) U4.F1(VDDQ7) U4.H2(VDDQ8) U4.H9(VDDQ9) U5.A1(VDDQ1) U5.A8(VDDQ2) U5.C1(VDDQ3) U5.C9(VDDQ4) U5.D2(VDDQ5) U5.E9(VDDQ6) U5.F1(VDDQ7) U5.H2(VDDQ8) U5.H9(VDDQ9) U6.A1(VDDQ1) U6.A8(VDDQ2) U6.C1(VDDQ3) U6.C9(VDDQ4) U6.D2(VDDQ5) U6.E9(VDDQ6) U6.F1(VDDQ7) U6.H2(VDDQ8) U6.H9(VDDQ9)
VCC_EFUSE: C134.1 U2.AD23(EFUSE)
VCC_LAN: R11.2 R61.2 R62.2 R63.2 R64.2 R65.2
VCC_OTP: Q6.3(D)
VCC_RTC: C30.1 C271.1 Q6.2(S) R6.1 R109.1 U1.9(VCCRTC) U1.52(BOOT0) U1.53(BOOT1)
VCC_SDIO: C24.1 C166.1 U1.12(VLDO4) U2.T23(SDMMC0_VDD)
VCC_SYS: C258.1 C263.1 C280.1 C281.1 C286.1 C292.1 C293.1 R118.1 U7.4(VIN) U8.4(VIN) U10.D1(VIN_1) U10.D2(VIN_2) U10.E1(VIN_3) U10.E2(VIN_4) U11.4(VIN) U12.D1(VIN_1) U12.D2(VIN_2) U12.E1(VIN_3) U12.E2(VIN_4)
VCC_SYST: C1.2 C4.2 C8.2 C9.2 C10.2 C11.2 C12.2 C17.1 U1.1(VCC10) U1.4(VCC7) U1.13(VCC9) U1.16(VCC11) U1.23(VCC2) U1.24(VCC2.) U1.32(VCC6) U1.35(VLDOA) U1.44(VCC1.) U1.45(VCC1) U1.59(VCC3) U1.60(VCC4)
